# Allegro board pc043b_single_maroc_24.brd
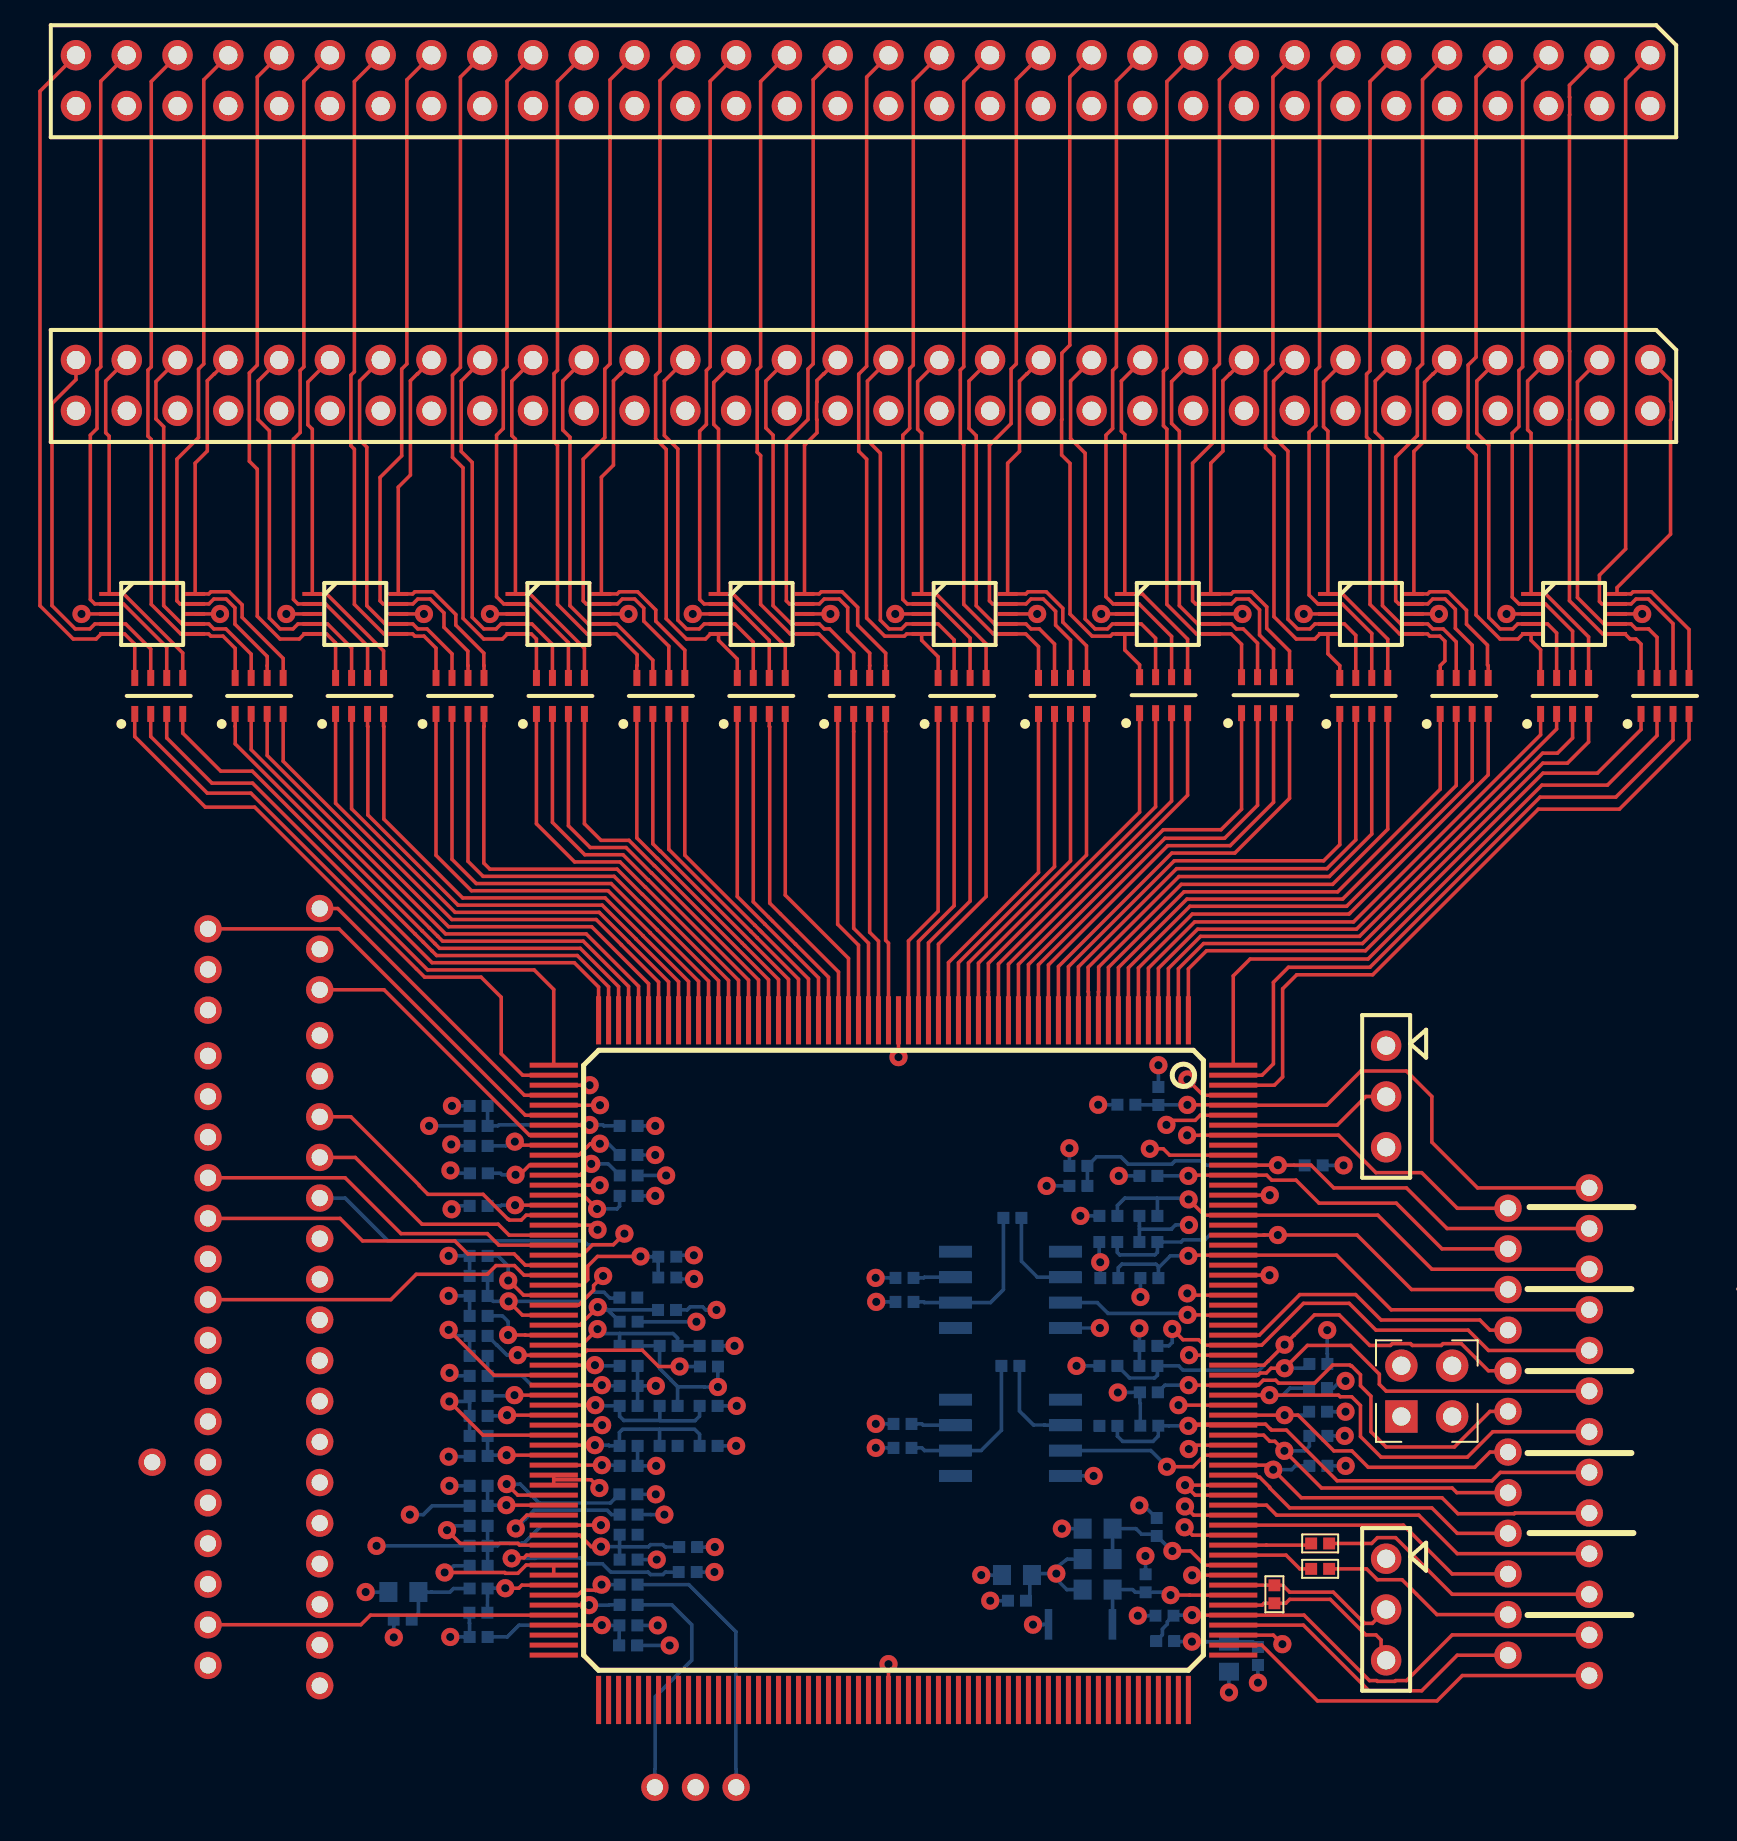
[diagram p0: board, top side]
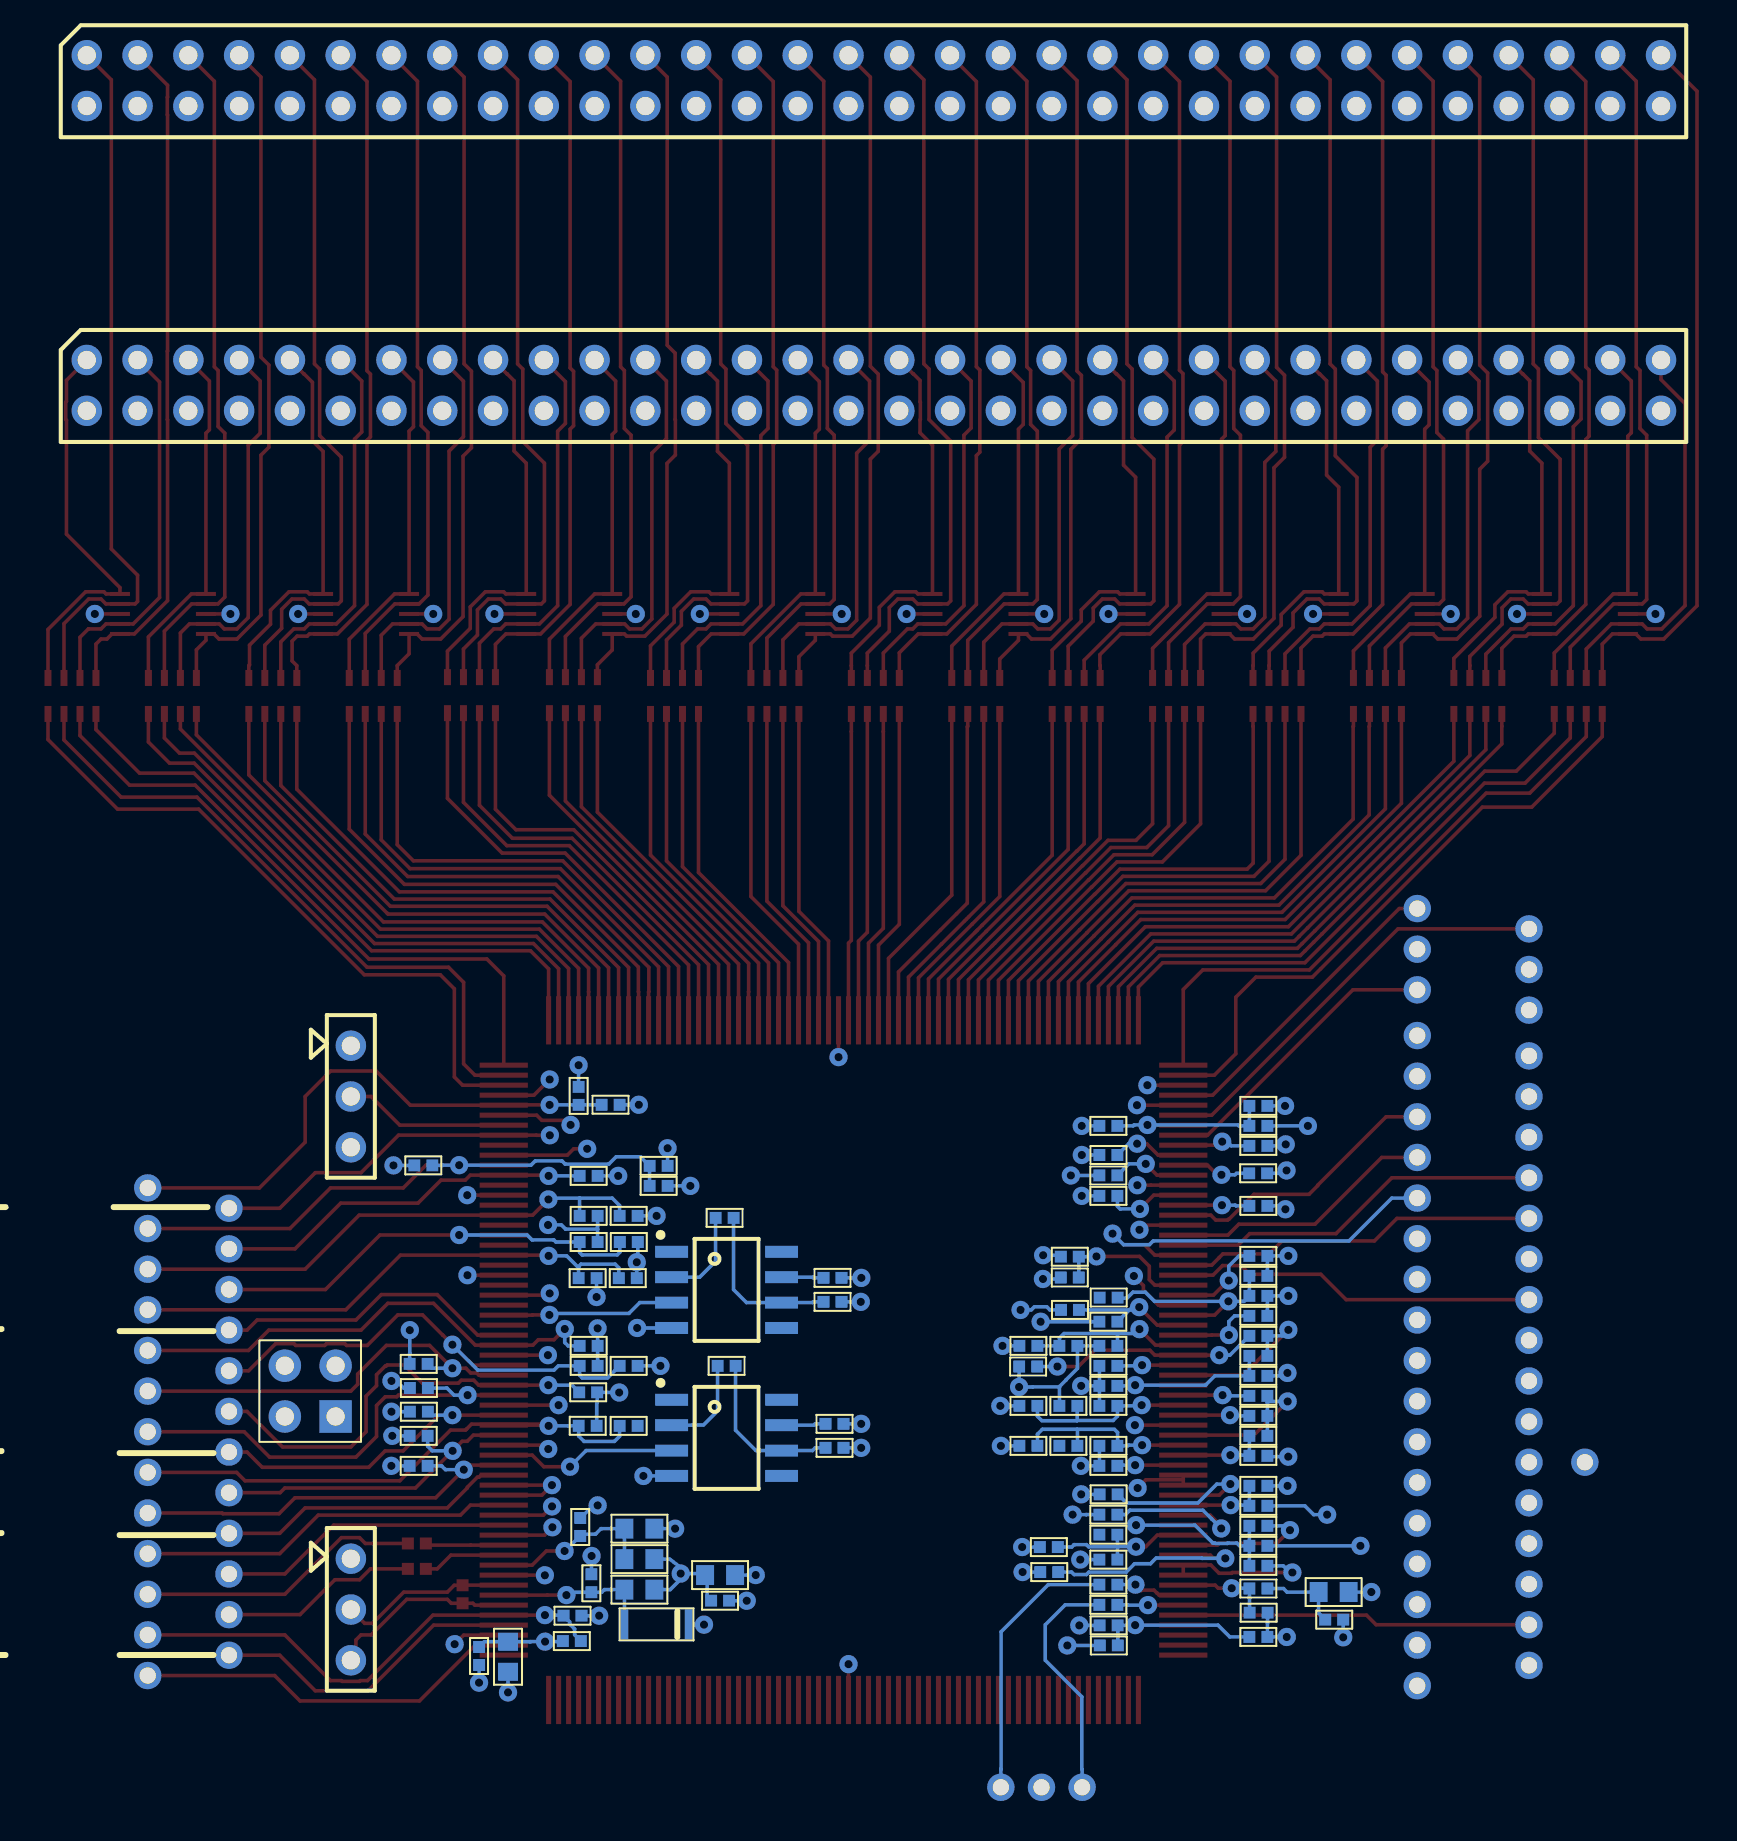
[diagram p1: board, bottom side, seen from below]

No outline. copper layers: TOP, L2, L3, L4, L5, BOTTOM. Coordinates in mm from the lowest, leftmost part position.

## Design rules (mm)
net group OR: nets OR<0> OR<1>
net group DC_BLOCKED_IN: nets DC_BLOCKED_IN<0> DC_BLOCKED_IN<1> DC_BLOCKED_IN<2> DC_BLOCKED_IN<3> DC_BLOCKED_IN<4> DC_BLOCKED_IN<5> DC_BLOCKED_IN<6> DC_BLOCKED_IN<7> DC_BLOCKED_IN<8> DC_BLOCKED_IN<9> DC_BLOCKED_IN<10> DC_BLOCKED_IN<11> DC_BLOCKED_IN<12> DC_BLOCKED_IN<13> DC_BLOCKED_IN<14> DC_BLOCKED_IN<15> DC_BLOCKED_IN<16> DC_BLOCKED_IN<17> DC_BLOCKED_IN<18> DC_BLOCKED_IN<19> DC_BLOCKED_IN<20> DC_BLOCKED_IN<21> DC_BLOCKED_IN<22> DC_BLOCKED_IN<23> DC_BLOCKED_IN<24> DC_BLOCKED_IN<25> DC_BLOCKED_IN<26> DC_BLOCKED_IN<27> DC_BLOCKED_IN<28> DC_BLOCKED_IN<29> DC_BLOCKED_IN<30> DC_BLOCKED_IN<31> DC_BLOCKED_IN<32> DC_BLOCKED_IN<33> DC_BLOCKED_IN<34> DC_BLOCKED_IN<35> DC_BLOCKED_IN<36> DC_BLOCKED_IN<37> DC_BLOCKED_IN<38> DC_BLOCKED_IN<39> DC_BLOCKED_IN<40> DC_BLOCKED_IN<41> DC_BLOCKED_IN<42> DC_BLOCKED_IN<43> DC_BLOCKED_IN<44> DC_BLOCKED_IN<45> DC_BLOCKED_IN<46> DC_BLOCKED_IN<47> DC_BLOCKED_IN<48> DC_BLOCKED_IN<49> DC_BLOCKED_IN<50> DC_BLOCKED_IN<51> DC_BLOCKED_IN<52> DC_BLOCKED_IN<53> DC_BLOCKED_IN<54> DC_BLOCKED_IN<55> DC_BLOCKED_IN<56> DC_BLOCKED_IN<57> DC_BLOCKED_IN<58> DC_BLOCKED_IN<59> DC_BLOCKED_IN<60> DC_BLOCKED_IN<61> DC_BLOCKED_IN<62> DC_BLOCKED_IN<63>
net group IN: nets IN<0> IN<1> IN<2> IN<3> IN<4> IN<5> IN<6> IN<7> IN<8> IN<9> IN<10> IN<11> IN<12> IN<13> IN<14> IN<15> IN<16> IN<17> IN<18> IN<19> IN<20> IN<21> IN<22> IN<23> IN<24> IN<25> IN<26> IN<27> IN<28> IN<29> IN<30> IN<31> IN<32> IN<33> IN<34> IN<35> IN<36> IN<37> IN<38> IN<39> IN<40> IN<41> IN<42> IN<43> IN<44> IN<45> IN<46> IN<47> IN<48> IN<49> IN<50> IN<51> IN<52> IN<53> IN<54> IN<55> IN<56> IN<57> IN<58> IN<59> IN<60> IN<61> IN<62> IN<63>
net group SUM: nets SUM<1> SUM<2> SUM<3> SUM<4> SUM<5> SUM<6> SUM<7> SUM<8>
net group TRIG: nets TRIG<0> TRIG<1> TRIG<2> TRIG<3> TRIG<4> TRIG<5> TRIG<6> TRIG<7> TRIG<8> TRIG<9> TRIG<10> TRIG<11> TRIG<12> TRIG<13> TRIG<14> TRIG<15> TRIG<16> TRIG<17> TRIG<18> TRIG<19> TRIG<20> TRIG<21> TRIG<22> TRIG<23> TRIG<24> TRIG<25> TRIG<26> TRIG<27> TRIG<28> TRIG<29> TRIG<30> TRIG<31> TRIG<32> TRIG<33> TRIG<34> TRIG<35> TRIG<36> TRIG<37> TRIG<38> TRIG<39> TRIG<40> TRIG<41> TRIG<42> TRIG<43> TRIG<44> TRIG<45> TRIG<46> TRIG<47> TRIG<48> TRIG<49> TRIG<50> TRIG<51> TRIG<52> TRIG<53> TRIG<54> TRIG<55> TRIG<56> TRIG<57> TRIG<58> TRIG<59> TRIG<60> TRIG<61> TRIG<62> TRIG<63>

## Placement (name value [footprint] x y rotation side)
C1  100nF  [C0402]  50.64 8.58 180 bottom
C2  100nF  [C0402]  16.32 8.73 0 bottom
C3  100nF  [C0402]  25.75 23.87 180 bottom
C4  100nF  [C0402]  50.33 34.57 270 bottom
C5  100nF  [C0402]  49.83 28.57 0 bottom
C6  100nF  [C0402]  16.33 34.07 0 bottom
C7  100nF  [C0402]  49.83 27.27 0 bottom
C8  100nF  [C0402]  16.33 33.07 0 bottom
C9  100nF  [C0402]  25.76 25.49 180 bottom
C10  100nF  [C0402]  49.88 25.46 0 bottom
C11  100nF  [C0402]  16.33 17.57 0 bottom
C12  100nF  [C0402]  49.83 21.07 0 bottom
C13  100nF  [C0402]  16.33 22.57 0 bottom
C14  100nF  [C0402]  16.33 15.07 0 bottom
C15  100nF  [C0402]  16.33 13.07 0 bottom
C16  100nF  [C0402]  49.87 18.08 0 bottom
C17  100nF  [C0402]  16.33 11.07 0 bottom
C18  100nF  [C0402]  16.33 32.07 0 bottom
C19  100nF  [C0402]  23.83 17.07 180 bottom
C20  100nF  [C0402]  16.33 29.07 0 bottom
C21  100nF  [C0402]  23.83 19.07 180 bottom
C22  100nF  [C0402]  16.33 23.57 0 bottom
C23  100nF  [C0402]  49.85 19.75 0 bottom
C24  100nF  [C0402]  16.33 25.57 0 bottom
C25  100nF  [C0402]  58.33 16.07 180 bottom
C26  100nF  [C0402]  16.33 18.57 0 bottom
C27  100nF  [C0402]  23.83 21.07 180 bottom
C28  100nF  [C0402]  23.83 29.57 180 bottom
C29  100nF  [C0402]  23.83 22.07 0 bottom
C30  100nF  [C0402]  23.83 13.64 180 bottom
C31  100nF  [C0402]  58.33 21.17 180 bottom
C32  100nF  [C0402]  23.83 31.62 180 bottom
C33  100nF  [C0402]  23.83 20.07 180 bottom
C34  100nF  [C0402]  26.81 12.01 180 bottom
C35  100nF  [C0402]  49.83 22.07 0 bottom
C36  100nF  [C0402]  23.84 30.59 180 bottom
C37  100nF  [C0402]  58.33 17.57 180 bottom
C38  100nF  [C0402]  58.1 31.1 180 bottom
C39  100nF  [C0402]  16.34 30.7 0 bottom
C40  100nF  [C0402]  16.33 26.57 0 bottom
C41  100nF  [C0402]  23.83 16.07 180 bottom
C42  100nF  [C0402]  58.32 19.97 180 bottom
C43  100nF  [C0402]  49.83 30.57 0 bottom
C44  100nF  [C0402]  23.82 8.1 180 bottom
C45  100nF  [C0402]  23.82 14.65 180 bottom
C46  100nF  [C0402]  58.32 18.78 180 bottom
C47  100nF  [C0402]  16.33 19.57 0 bottom
C48  100nF  [C0402]  37.53 18.17 180 bottom
C49  100nF  [C0402]  37.63 25.47 180 bottom
C50  100nF  [C0402]  49.69 10.2 270 bottom
C51  100nF  [C0402]  50.25 13.02 270 bottom
C52  10uF  [C0603]  53.86 6.53 90 bottom
C53  10uF  [C0603]  12.57 9.76 0 bottom
C54  10uF  [C0603]  43.25 10.61 0 bottom
CN1  100nF/16V  [CAPCAF80P160X320X110-8N]  0.33 54.57 90 top
CN2  100nF/16V  [CAPCAF80P160X320X110-8N]  5.35 54.57 90 top
CN3  100nF/16V  [CAPCAF80P160X320X110-8N]  10.38 54.57 90 top
CN4  100nF/16V  [CAPCAF80P160X320X110-8N]  15.4 54.57 90 top
CN5  100nF/16V  [CAPCAF80P160X320X110-8N]  20.42 54.57 90 top
CN6  100nF/16V  [CAPCAF80P160X320X110-8N]  25.44 54.57 90 top
CN7  100nF/16V  [CAPCAF80P160X320X110-8N]  30.47 54.57 90 top
CN8  100nF/16V  [CAPCAF80P160X320X110-8N]  35.49 54.57 90 top
CN9  100nF/16V  [CAPCAF80P160X320X110-8N]  40.51 54.57 90 top
CN10  100nF/16V  [CAPCAF80P160X320X110-8N]  45.53 54.57 90 top
CN11  100nF/16V  [CAPCAF80P160X320X110-8N]  50.59 54.61 90 top
CN12  100nF/16V  [CAPCAF80P160X320X110-8N]  55.69 54.61 90 top
CN13  100nF/16V  [CAPCAF80P160X320X110-8N]  60.6 54.57 90 top
CN14  100nF/16V  [CAPCAF80P160X320X110-8N]  65.63 54.57 90 top
CN15  100nF/16V  [CAPCAF80P160X320X110-8N]  70.65 54.57 90 top
CN16  100nF/16V  [CAPCAF80P160X320X110-8N]  75.67 54.57 90 top
D1  -  [SOD80C]  48.03 8.15 180 bottom
IC1  -  [SOIC127P598X200-8N]  42.93 17.47 180 bottom
IC2  -  [SOIC127P598X200-8N]  42.93 24.87 180 bottom
J1  -  [CONHE13D2X32M]  74.93 86.61 90 top
J2  -  [CONHE13D2X32M]  74.93 71.37 90 top
J3  -  [CONHE13D3X1M]  61.72 11.43 270 top
J4  -  [CONHE13D3X1M]  61.72 37.08 270 top
LK1  -  [1-HOLE_0-8P]  71.88 7.62 0 top
LK2  -  [1-HOLE_0-8P]  8.38 9.14 0 top
LK3  -  [1-HOLE_0-8P]  2.79 32.51 0 top
LK4  -  [1-HOLE_0-8P]  71.88 29.97 0 top
LK5  -  [1-HOLE_0-8P]  71.88 25.91 0 top
LK6  -  [1-HOLE_0-8P]  67.82 28.96 0 top
LK7  -  [1-HOLE_0-8P]  67.82 24.89 0 top
LK8  -  [1-HOLE_0-8P]  2.79 34.54 0 top
LK9  -  [1-HOLE_0-8P]  71.88 23.88 0 top
LK10  -  [1-HOLE_0-8P]  67.82 20.83 0 top
LK11  -  [1-HOLE_0-8P]  2.79 22.35 0 top
LK12  -  [1-HOLE_0-8P]  8.38 15.24 0 top
LK13  -  [1-HOLE_0-8P]  71.88 15.75 0 top
LK14  -  [1-HOLE_0-8P]  2.79 12.19 0 top
LK15  -  [1-HOLE_0-8P]  8.38 7.11 0 top
LK16  -  [1-HOLE_0-8P]  8.38 37.59 0 top
LK17  -  [1-HOLE_0-8P]  2.79 14.22 0 top
LK18  -  [1-HOLE_0-8P]  8.38 35.56 0 top
LK19  -  [1-HOLE_0-8P]  8.38 17.27 0 top
LK20  -  [1-HOLE_0-8P]  8.38 23.37 0 top
LK21  -  [1-HOLE_0-8P]  67.82 18.8 0 top
LK22  -  [1-HOLE_0-8P]  2.79 26.42 0 top
LK23  -  [1-HOLE_0-8P]  71.88 13.72 0 top
LK24  -  [1-HOLE_0-8P]  2.79 18.29 0 top
LK25  -  [1-HOLE_0-8P]  8.38 21.34 0 top
LK26  -  [1-HOLE_0-8P]  71.88 5.59 0 top
LK27  -  [1-HOLE_0-8P]  2.79 16.26 0 top
LK28  -  [1-HOLE_0-8P]  71.88 11.68 0 top
LK29  -  [1-HOLE_0-8P]  67.82 10.67 0 top
LK30  -  [1-HOLE_0-8P]  0 16.26 0 top
LK31  -  [1-HOLE_0-8P]  2.79 38.86 0 top
LK32  -  [1-HOLE_0-8P]  8.38 25.4 0 top
LK33  -  [1-HOLE_0-8P]  8.38 11.18 0 top
LK34  -  [1-HOLE_0-8P]  71.88 19.81 0 top
LK35  -  [1-HOLE_0-8P]  8.38 41.91 0 top
LK36  -  [1-HOLE_0-8P]  2.79 20.32 0 top
LK37  -  [1-HOLE_0-8P]  2.79 6.1 0 top
LK38  -  [1-HOLE_0-8P]  71.88 21.84 0 top
LK39  -  [1-HOLE_0-8P]  2.79 40.89 0 top
LK40  -  [1-HOLE_0-8P]  67.82 14.73 0 top
LK41  -  [1-HOLE_0-8P]  71.88 27.94 0 top
LK42  -  [1-HOLE_0-8P]  2.79 36.58 0 top
LK43  -  [1-HOLE_0-8P]  8.38 27.43 0 top
LK44  -  [1-HOLE_0-8P]  2.79 10.16 0 top
LK45  -  [1-HOLE_0-8P]  71.88 17.78 0 top
LK46  -  [1-HOLE_0-8P]  67.82 26.92 0 top
LK47  -  [1-HOLE_0-8P]  8.38 5.08 0 top
LK48  -  [1-HOLE_0-8P]  8.38 13.21 0 top
LK49  -  [1-HOLE_0-8P]  67.82 16.76 0 top
LK50  -  [1-HOLE_0-8P]  8.38 19.3 0 top
LK51  -  [1-HOLE_0-8P]  67.82 8.64 0 top
LK52  -  [1-HOLE_0-8P]  71.88 9.65 0 top
LK53  -  [1-HOLE_0-8P]  8.38 29.46 0 top
LK54  -  [1-HOLE_0-8P]  25.15 0 0 top
LK55  -  [1-HOLE_0-8P]  27.18 0 0 top
LK56  -  [1-HOLE_0-8P]  29.21 0 0 top
LK57  -  [1-HOLE_0-8P]  8.38 39.88 0 top
LK58  -  [1-HOLE_0-8P]  67.82 22.86 0 top
LK59  -  [1-HOLE_0-8P]  2.79 8.13 0 top
LK60  -  [1-HOLE_0-8P]  8.38 43.94 0 top
LK61  -  [1-HOLE_0-8P]  8.38 33.53 0 top
LK62  -  [1-HOLE_0-8P]  2.79 30.48 0 top
LK63  -  [1-HOLE_0-8P]  67.82 12.7 0 top
LK64  -  [1-HOLE_0-8P]  8.38 31.5 0 top
LK65  -  [1-HOLE_0-8P]  2.79 28.45 0 top
LK66  -  [1-HOLE_0-8P]  2.79 42.93 0 top
LK67  -  [1-HOLE_0-8P]  2.79 24.38 0 top
LK68  -  [1-HOLE_0-8P]  67.82 6.6 0 top
PL1  -  [HEADER2X2_STR]  62.48 18.54 90 bottom
R1  51  [C0402]  58.42 10.92 0 top
R2  51  [C0402]  58.42 12.19 0 top
R3  10R  [C0402]  50.67 7.31 180 bottom
R4  10R  [C0402]  16.33 9.94 0 bottom
R5  10R  [C0402]  23.83 23.28 0 bottom
R6  10R  [C0402]  48.73 34.13 180 bottom
R7  10R  [C0402]  47.83 28.57 180 bottom
R8  10R  [C0402]  23.83 33.07 0 bottom
R9  10R  [C0402]  47.82 27.27 180 bottom
R10  10R  [C0402]  25.76 26.53 0 bottom
R11  10R  [C0402]  47.87 25.46 180 bottom
R12  10R  [C0402]  16.33 16.57 180 bottom
R13  10R  [C0402]  47.83 21.07 180 bottom
R14  100  [C0402]  27.85 21.04 0 bottom
R15  10R  [C0402]  16.33 14.07 180 bottom
R16  10R  [C0402]  16.33 12.07 180 bottom
R17  100  [C0402]  47.83 18.07 180 bottom
R18  51  [C0402]  23.83 9.12 180 bottom
R19  51  [C0402]  23.83 10.13 180 bottom
R20  XX  [C0402]  25.83 17.07 0 bottom
R21  XX  [C0402]  27.83 17.07 180 bottom
R22  XX  [C0402]  25.83 19.07 0 bottom
R23  XX  [C0402]  27.83 19.07 180 bottom
R24  100  [C0402]  56.13 9.65 270 top
R25  XX  [C0402]  23.82 24.49 0 bottom
R26  XX  [C0402]  16.33 24.57 0 bottom
R27  1k  [C0402]  26.79 10.76 0 bottom
R28  XX  [C0402]  25.83 22.07 180 bottom
R29  XX  [C0402]  27.83 22.07 180 bottom
R30  XX  [C0402]  16.33 20.57 180 bottom
R31  XX  [C0402]  16.33 21.57 0 bottom
R32  XX  [C0402]  23.83 12.63 0 bottom
R33  XX  [C0402]  23.83 11.39 180 bottom
R34  XX  [C0402]  46.33 31.07 180 bottom
R35  XX  [C0402]  46.33 30.07 0 bottom
R36  XX  [C0402]  23.81 7.09 0 bottom
R37  XX  [C0402]  16.33 7.52 0 bottom
R38  51R  [C0402]  42.93 21.07 180 bottom
R39  51R  [C0402]  43.03 28.47 180 bottom
R40  51R  [C0402]  37.53 16.97 180 bottom
R41  51R  [C0402]  37.63 24.27 180 bottom
R42  82  [C0603]  47.29 9.89 180 bottom
R44  150  [C0603]  47.29 11.41 180 bottom
R45  120  [C0603]  47.29 12.93 0 bottom
R46  3.3R  [C0402]  55.31 6.56 90 bottom
R47  3.3R  [C0402]  12.54 8.38 0 bottom
R48  3.3R  [C0402]  43.25 9.33 180 bottom
U1  -  [PQFP240_050]  51.83 38.35 270 top
U2  -  [SOT552-1]  71.12 58.67 0 top
U3  -  [SOT552-1]  60.96 58.67 0 top
U4  -  [SOT552-1]  50.8 58.67 0 top
U5  -  [SOT552-1]  40.64 58.67 0 top
U6  -  [SOT552-1]  30.48 58.67 0 top
U7  -  [SOT552-1]  20.32 58.67 0 top
U8  -  [SOT552-1]  10.16 58.67 0 top
U9  -  [SOT552-1]  0 58.67 0 top

## Library data of the parts
C1-C17 = CAPCERSMDCL2: part number: CAPCERSMDCL2_0402-100NF_X7R,16V; tolerance: 10%
C18-C51 = CAPCERSMDCL2: part number: CAPCERSMDCL2_0402-100NF,16V; tolerance: 10%
C52-C54 = CAPCERSMDCL2: part number: CAPCERSMDCL2_0603-10UF_X5R,6.3V
CN1-CN16 = CAPN4I: part number: CAPN4I-100NF,16V,X7R,CKCA43
D1 = BAS32L: part number: BAS32L-BAS32L
IC1 IC2 = AD8061: part number: AD8061ARZ
J1 J2 = CON64P: part number: CON64P-BARD2X32
J3 J4 = CON3P: part number: CON3P-SIL254D
LK1-LK68 = 1-HOLE: part number: 1-HOLE_0-8-BASE
PL1 = HEADER2X2: part number: HEADER2X2_STR-HARWIN
R1 R2 R18 R19 = RSMD0402: part number: RSMD0402_1/16W-51,1%; tolerance: 1%
R3-R13 R15 R16 = RSMD0402: part number: RSMD0402_1/16W-10R,5%; tolerance: 5%
R14 R17 = RSMD0402: part number: RSMD0402_1/16W-100,0.1%_GEN; tolerance: 0.1%
R20-R23 R25 R26 R28-R37 = RSMD0402: part number: RSMD0402_0.0625W-XX,1%; tolerance: 1%
R24 = RSMD0402: part number: RSMD0402_1/16W-100,1%; tolerance: 1%
R27 = RSMD0402: part number: RSMD0402_1/16W-1K,5%; tolerance: 5%
R38-R41 = RSMD0402: part number: RSMD0402_1/16W-51R,5%; tolerance: 5%
R42 = RSMD0603: part number: RSMD0603_1/10W-82,1%; tolerance: 1%
R44 = RSMD0603: part number: RSMD0603_1/10W-150,1%; tolerance: 1%
R45 = RSMD0603: part number: RSMD0603_1/10W-120,1%; tolerance: 1%
R46-R48 = RSMD0402: part number: RSMD0402_1/16W-3.3R,5%; tolerance: 5%
U1 = MAROC3: part number: MAROC3_PQFP-IN2P3
U2-U9 = PRTR5V0U8S: part number: PRTR5V0U8S_TSSOP-NXP

## Footprints (pads in the part's own frame, mm; a bottom-side part is the same pattern mirrored in y, then rotated)
1-HOLE_0-8P
  round 1.372 hole 0.813: 1(0,0)
C0402
  rect 0.6x0.6 smd: 1(-0.45,0) 2(0.45,0)
C0603
  rect 0.9x1 smd: 1(-0.75,0) 2(0.75,0)
CAPCAF80P160X320X110-8N
  rect 0.8x0.35 smd: 1(-0.9,1.2) 2(0.9,1.2) 3(-0.9,0.4) 4(0.9,0.4) 5(-0.9,-0.4) 6(0.9,-0.4) 7(-0.9,-1.2) 8(0.9,-1.2)
CONHE13D2X32M
  round 1.524 hole 0.914: 1(0,0) 2(-2.54,0) 3(0,2.54) 4(-2.54,2.54) 5(0,5.08) 6(-2.54,5.08) 7(0,7.62) 8(-2.54,7.62) 9(0,10.16) 10(-2.54,10.16) 11(0,12.7) 12(-2.54,12.7) 13(0,15.24) 14(-2.54,15.24) 15(0,17.78) 16(-2.54,17.78) 17(0,20.32) 18(-2.54,20.32) 19(0,22.86) 20(-2.54,22.86) 21(0,25.4) 22(-2.54,25.4) 23(0,27.94) 24(-2.54,27.94) 25(0,30.48) 26(-2.54,30.48) 27(0,33.02) 28(-2.54,33.02) 29(0,35.56) 30(-2.54,35.56) 31(0,38.1) 32(-2.54,38.1) 33(0,40.64) 34(-2.54,40.64) 35(0,43.18) 36(-2.54,43.18) 37(0,45.72) 38(-2.54,45.72) 39(0,48.26) 40(-2.54,48.26) 41(0,50.8) 42(-2.54,50.8) 43(0,53.34) 44(-2.54,53.34) 45(0,55.88) 46(-2.54,55.88) 47(0,58.42) 48(-2.54,58.42) 49(0,60.96) 50(-2.54,60.96) 51(0,63.5) 52(-2.54,63.5) 53(0,66.04) 54(-2.54,66.04) 55(0,68.58) 56(-2.54,68.58) 57(0,71.12) 58(-2.54,71.12) 59(0,73.66) 60(-2.54,73.66) 61(0,76.2) 62(-2.54,76.2) 63(0,78.74) 64(-2.54,78.74)
CONHE13D3X1M
  round 1.524 hole 0.914: 1(0,0) 2(2.54,0) 3(5.08,0)
HEADER2X2_STR
  rect 1.626x1.626 hole 0.914: 1(0,0)
  round 1.626 hole 0.914: 2(0,2.54) 3(2.54,0) 4(2.54,2.54)
PQFP240_050
  rect 2.413x0.254 smd: 1(0,0) 2(0,-0.5) 3(0,-1) 4(0,-1.5) 5(0,-2) 6(0,-2.5) 7(0,-3) 8(0,-3.5) 9(0,-4) 10(0,-4.5) 11(0,-5) 12(0,-5.5) 13(0,-6) 14(0,-6.5) 15(0,-7) 16(0,-7.5) 17(0,-8) 18(0,-8.5) 19(0,-9) 20(0,-9.5) 21(0,-10) 22(0,-10.5) 23(0,-11) 24(0,-11.5) 25(0,-12) 26(0,-12.5) 27(0,-13) 28(0,-13.5) 29(0,-14) 30(0,-14.5) 31(0,-15) 32(0,-15.5) 33(0,-16) 34(0,-16.5) 35(0,-17) 36(0,-17.5) 37(0,-18) 38(0,-18.5) 39(0,-19) 40(0,-19.5) 41(0,-20) 42(0,-20.5) 43(0,-21) 44(0,-21.5) 45(0,-22) 46(0,-22.5) 47(0,-23) 48(0,-23.5) 49(0,-24) 50(0,-24.5) 51(0,-25) 52(0,-25.5) 53(0,-26) 54(0,-26.5) 55(0,-27) 56(0,-27.5) 57(0,-28) 58(0,-28.5) 59(0,-29) 60(0,-29.5) 121(33.987,-29.5) 122(33.987,-29) 123(33.987,-28.5) 124(33.987,-28) 125(33.987,-27.5) 126(33.987,-27) 127(33.987,-26.5) 128(33.987,-26) 129(33.987,-25.5) 130(33.987,-25) 131(33.987,-24.5) 132(33.987,-24) 133(33.987,-23.5) 134(33.987,-23) 135(33.987,-22.5) 136(33.987,-22) 137(33.987,-21.5) 138(33.987,-21) 139(33.987,-20.5) 140(33.987,-20) 141(33.987,-19.5) 142(33.987,-19) 143(33.987,-18.5) 144(33.987,-18) 145(33.987,-17.5) 146(33.987,-17) 147(33.987,-16.5) 148(33.987,-16) 149(33.987,-15.5) 150(33.987,-15) 151(33.987,-14.5) 152(33.987,-14) 153(33.987,-13.5) 154(33.987,-13) 155(33.987,-12.5) 156(33.987,-12) 157(33.987,-11.5) 158(33.987,-11) 159(33.987,-10.5) 160(33.987,-10) 161(33.987,-9.5) 162(33.987,-9) 163(33.987,-8.5) 164(33.987,-8) 165(33.987,-7.5) 166(33.987,-7) 167(33.987,-6.5) 168(33.987,-6) 169(33.987,-5.5) 170(33.987,-5) 171(33.987,-4.5) 172(33.987,-4) 173(33.987,-3.5) 174(33.987,-3) 175(33.987,-2.5) 176(33.987,-2) 177(33.987,-1.5) 178(33.987,-1) 179(33.987,-0.5) 180(33.987,0)
  rect 0.254x2.413 smd: 61(2.244,-31.744) 62(2.744,-31.744) 63(3.244,-31.744) 64(3.744,-31.744) 65(4.244,-31.744) 66(4.744,-31.744) 67(5.244,-31.744) 68(5.744,-31.744) 69(6.244,-31.744) 70(6.744,-31.744) 71(7.244,-31.744) 72(7.744,-31.744) 73(8.243,-31.744) 74(8.743,-31.744) 75(9.243,-31.744) 76(9.743,-31.744) 77(10.243,-31.744) 78(10.743,-31.744) 79(11.243,-31.744) 80(11.743,-31.744) 81(12.243,-31.744) 82(12.743,-31.744) 83(13.243,-31.744) 84(13.743,-31.744) 85(14.243,-31.744) 86(14.743,-31.744) 87(15.243,-31.744) 88(15.743,-31.744) 89(16.244,-31.744) 90(16.744,-31.744) 91(17.244,-31.744) 92(17.744,-31.744) 93(18.244,-31.744) 94(18.744,-31.744) 95(19.244,-31.744) 96(19.744,-31.744) 97(20.244,-31.744) 98(20.744,-31.744) 99(21.244,-31.744) 100(21.744,-31.744) 101(22.244,-31.744) 102(22.744,-31.744) 103(23.244,-31.744) 104(23.744,-31.744) 105(24.244,-31.744) 106(24.744,-31.744) 107(25.244,-31.744) 108(25.744,-31.744) 109(26.244,-31.744) 110(26.744,-31.744) 111(27.244,-31.744) 112(27.744,-31.744) 113(28.244,-31.744) 114(28.744,-31.744) 115(29.244,-31.744) 116(29.744,-31.744) 117(30.244,-31.744) 118(30.744,-31.744) 119(31.244,-31.744) 120(31.744,-31.744) 181(31.744,2.244) 182(31.244,2.244) 183(30.744,2.244) 184(30.244,2.244) 185(29.744,2.244) 186(29.244,2.244) 187(28.744,2.244) 188(28.244,2.244) 189(27.744,2.244) 190(27.244,2.244) 191(26.744,2.244) 192(26.244,2.244) 193(25.744,2.244) 194(25.244,2.244) 195(24.744,2.244) 196(24.244,2.244) 197(23.744,2.244) 198(23.244,2.244) 199(22.744,2.244) 200(22.244,2.244) 201(21.744,2.244) 202(21.244,2.244) 203(20.744,2.244) 204(20.244,2.244) 205(19.744,2.244) 206(19.244,2.244) 207(18.744,2.244) 208(18.244,2.244) 209(17.744,2.244) 210(17.244,2.244) 211(16.744,2.244) 212(16.244,2.244) 213(15.743,2.244) 214(15.243,2.244) 215(14.743,2.244) 216(14.243,2.244) 217(13.743,2.244) 218(13.243,2.244) 219(12.743,2.244) 220(12.243,2.244) 221(11.743,2.244) 222(11.243,2.244) 223(10.743,2.244) 224(10.243,2.244) 225(9.743,2.244) 226(9.243,2.244) 227(8.743,2.244) 228(8.243,2.244) 229(7.744,2.244) 230(7.244,2.244) 231(6.744,2.244) 232(6.244,2.244) 233(5.744,2.244) 234(5.244,2.244) 235(4.744,2.244) 236(4.244,2.244) 237(3.744,2.244) 238(3.244,2.244) 239(2.744,2.244) 240(2.244,2.244)
SOD80C
  rect 0.381x1.524 smd: 1(0,0) 2(3.2,0)
SOIC127P598X200-8N
  rect 1.65x0.6 smd: 1(-2.75,1.905) 2(-2.75,0.635) 3(-2.75,-0.635) 4(-2.75,-1.905) 5(2.75,-1.905) 6(2.75,-0.635) 7(2.75,0.635) 8(2.75,1.905)
SOT552-1
  rect 1x0.2 smd: 1(-2.15,1) 2(-2.15,0.5) 3(-2.15,0) 4(-2.15,-0.5) 5(-2.15,-1) 6(2.15,-1) 7(2.15,-0.5) 8(2.15,0) 9(2.15,0.5) 10(2.15,1)

## Nets
AVDD: C29.2(B<0>) C48.1(A<0>) C49.1(A<0>) IC1.7(PVS) IC2.7(PVS) R5.2(B<0>) R6.2(B<0>) R7.2(B<0>) R8.2(B<0>) R9.2(B<0>) R10.2(B<0>) R11.2(B<0>) R12.2(B<0>) R13.2(B<0>) R14.2(B<0>) R15.2(B<0>) R16.2(B<0>) R17.2(B<0>) R20.2(B<0>) R22.2(B<0>) R25.2(B<0>) R27.2(B<0>) R28.2(B<0>) R30.2(B<0>) R32.2(B<0>) R34.2(B<0>) R36.2(B<0>) R46.1(A<0>) R47.1(A<0>) R48.2(B<0>)
GND_SIGNAL: C1.2(B<0>) C2.1(A<0>) C3.1(A<0>) C4.1(A<0>) C5.1(A<0>) C6.1(A<0>) C7.1(A<0>) C8.1(A<0>) C9.1(A<0>) C10.1(A<0>) C11.1(A<0>) C12.1(A<0>) C13.1(A<0>) C14.1(A<0>) C15.1(A<0>) C16.1(A<0>) C17.1(A<0>) C18.1(A<0>) C19.1(A<0>) C20.1(A<0>) C21.1(A<0>) C22.1(A<0>) C23.1(A<0>) C24.1(A<0>) C25.1(A<0>) C26.1(A<0>) C27.1(A<0>) C28.1(A<0>) C30.1(A<0>) C31.1(A<0>) C32.1(A<0>) C33.1(A<0>) C34.1(A<0>) C35.1(A<0>) C36.1(A<0>) C37.1(A<0>) C38.1(A<0>) C39.1(A<0>) C40.1(A<0>) C41.1(A<0>) C42.1(A<0>) C43.1(A<0>) C44.1(A<0>) C45.1(A<0>) C46.1(A<0>) C47.1(A<0>) C48.2(B<0>) C49.2(B<0>) C50.1(A<0>) C51.1(A<0>) C52.1(A<0>) C53.1(A<0>) C54.1(A<0>) D1.2(K<0>) IC1.4(MVS) IC2.4(MVS) J1.2(A<1>) J1.4(A<3>) J1.6(A<5>) J1.8(A<7>) J1.10(A<9>) J1.12(A<11>) J1.14(A<13>) J1.16(A<15>) J1.18(A<17>) J1.20(A<19>) J1.22(A<21>) J1.24(A<23>) J1.26(A<25>) J1.28(A<27>) J1.30(A<29>) J1.32(A<31>) J1.34(A<33>) J1.36(A<35>) J1.38(A<37>) J1.40(A<39>) J1.42(A<41>) J1.44(A<43>) J1.46(A<45>) J1.48(A<47>) J1.50(A<49>) J1.52(A<51>) J1.54(A<53>) J1.56(A<55>) J1.58(A<57>) J1.60(A<59>) J1.62(A<61>) J1.64(A<63>) J2.2(A<1>) J2.4(A<3>) J2.6(A<5>) J2.8(A<7>) J2.10(A<9>) J2.12(A<11>) J2.14(A<13>) J2.16(A<15>) J2.18(A<17>) J2.20(A<19>) J2.22(A<21>) J2.24(A<23>) J2.26(A<25>) J2.28(A<27>) J2.30(A<29>) J2.32(A<31>) J2.34(A<33>) J2.36(A<35>) J2.38(A<37>) J2.40(A<39>) J2.42(A<41>) J2.44(A<43>) J2.46(A<45>) J2.48(A<47>) J2.50(A<49>) J2.52(A<51>) J2.54(A<53>) J2.56(A<55>) J2.58(A<57>) J2.60(A<59>) J2.62(A<61>) J2.64(A<63>) J3.1(A<0>) J4.3(A<2>) LK30.1(A<0>) LK55.1(A<0>) PL1.2(B1<0>) PL1.4(B2<0>) R21.1(A<0>) R23.1(A<0>) R26.1(A<0>) R29.1(A<0>) R31.1(A<0>) R33.1(A<0>) R35.1(A<0>) R37.1(A<0>) R45.1(A<0>) U1.30(GND_PA2) U1.63(GND_PA) U1.65(VSSA) U1.73(GND_NMOS) U1.77(GND_W) U1.85(GND_DAC) U1.92(E_FSU) U1.98(GND_WILK) U1.102(VSSA2) U1.103(VSSM) U1.109(GND_DISCRI) U1.111(VSSD) U1.112(GNDD) U1.150(VSSD2) U1.183(GNDD2) U1.189(VSSD3) U1.195(GND_DISCRI2) U1.197(VSSM2) U1.198(VSS) U1.202(GND_FSU) U1.206(GND_FSB1) U1.211(GND_FSB0) U1.217(GND_CAPA) U1.219(GND_SS) U1.227(GND_OTAG) U1.231(GND_NMOS2) U1.235(VSSI) U1.237(GND_PA3) U2.3 U2.8 U3.3 U3.8 U4.3 U4.8 U5.3 U5.8 U6.3 U6.8 U7.3 U7.8 U8.3 U8.8 U9.3 U9.8
VDD_BUF1: C7.2(B<0>) LK7.1(A<0>) R9.1(A<0>) U1.223(VDD_BUF1)
VDD_DAC: C3.2(B<0>) LK3.1(A<0>) R5.1(A<0>) U1.87(VDD_DAC)
VDD_DISCRI: C14.2(B<0>) LK14.1(A<0>) R15.1(A<0>) U1.105(VDD_DISCRI)
VDD_DISCRIADC: C15.2(B<0>) C17.2(B<0>) LK15.1(A<0>) R16.1(A<0>) U1.107(VDD_DISCRIADC) U1.193(VDD_DISCRIADC2)
VDD_FSB: C12.2(B<0>) LK10.1(A<0>) R13.1(A<0>) U1.210(VDD_FSB)
VDD_FSU1: C13.2(B<0>) LK11.1(A<0>) R14.1(A<0>) U1.90(VDD_FSU1)
VDD_FSU2: C16.2(B<0>) LK13.1(A<0>) R17.1(A<0>) U1.204(VDD_FSU2)
VDD_OTAG: C5.2(B<0>) LK5.1(A<0>) R7.1(A<0>) U1.225(VDD_OTAG)
VDD_PA: C6.2(B<0>) C8.2(B<0>) LK6.1(A<0>) R8.1(A<0>) U1.67(VDD_PA) U1.233(VDD_PA2)
VDD_PAD: C4.2(B<0>) LK4.1(A<0>) R6.1(A<0>) U1.236(VDD_PAD)
VDD_SS: C10.2(B<0>) LK9.1(A<0>) R11.1(A<0>) U1.221(VDD_SS)
VDD_W: C9.2(B<0>) LK8.1(A<0>) R10.1(A<0>) U1.83(VDD_W)
VDD_WILK: C11.2(B<0>) LK12.1(A<0>) R12.1(A<0>) U1.100(VDD_WILK)
VDDD: C1.1(A<0>) LK1.1(A<0>) R3.2(B<0>) U1.185(VDDD)
VDDD2: C2.2(B<0>) LK2.1(A<0>) R4.2(B<0>) U1.113(VDDD2)
ADC_DAV: LK54.1(A<0>) R18.1(A<0>)
BUF_OUT_FS: PL1.1(A1<0>) R40.2(B<0>)
BUF_OUT_Q: PL1.3(A2<0>) R41.2(B<0>)
CK_40M: J3.2(A<1>) R24.1(A<0>) U1.188(CK_40M)
CK_R: LK64.1(A<0>) U1.78(CK_R)
CK_SC: LK57.1(A<0>) U1.68(CK_SC)
CKB_40M: J3.3(A<2>) R24.2(B<0>) U1.186(CKB_40M)
CTEST: J4.1(A<0>)
D_R: LK67.1(A<0>) U1.82(D_R)
D_SC: LK60.1(A<0>) U1.64(D_SC)
DC_BLOCKED_IN<0>: CN16.7(A<0>) U1.238(IN0)
DC_BLOCKED_IN<1>: CN16.5(A<0>) U1.239(IN1)
DC_BLOCKED_IN<2>: CN16.3(A<0>) U1.240(IN2)
DC_BLOCKED_IN<3>: CN16.1(A<0>) U1.1(IN3)
DC_BLOCKED_IN<4>: CN15.7(A<0>) U1.2(IN4)
DC_BLOCKED_IN<5>: CN15.5(A<0>) U1.3(IN5)
DC_BLOCKED_IN<6>: CN15.3(A<0>) U1.4(IN6)
DC_BLOCKED_IN<7>: CN15.1(A<0>) U1.5(IN7)
DC_BLOCKED_IN<8>: CN14.7(A<0>) U1.6(IN8)
DC_BLOCKED_IN<9>: CN14.5(A<0>) U1.7(IN9)
DC_BLOCKED_IN<10>: CN14.3(A<0>) U1.8(IN10)
DC_BLOCKED_IN<11>: CN14.1(A<0>) U1.9(IN11)
DC_BLOCKED_IN<12>: CN13.7(A<0>) U1.10(IN12)
DC_BLOCKED_IN<13>: CN13.5(A<0>) U1.11(IN13)
DC_BLOCKED_IN<14>: CN13.3(A<0>) U1.12(IN14)
DC_BLOCKED_IN<15>: CN13.1(A<0>) U1.13(IN15)
DC_BLOCKED_IN<16>: CN12.7(A<0>) U1.14(IN16)
DC_BLOCKED_IN<17>: CN12.5(A<0>) U1.15(IN17)
DC_BLOCKED_IN<18>: CN12.3(A<0>) U1.16(IN18)
DC_BLOCKED_IN<19>: CN12.1(A<0>) U1.17(IN19)
DC_BLOCKED_IN<20>: CN11.7(A<0>) U1.18(IN20)
DC_BLOCKED_IN<21>: CN11.5(A<0>) U1.19(IN21)
DC_BLOCKED_IN<22>: CN11.3(A<0>) U1.20(IN22)
DC_BLOCKED_IN<23>: CN11.1(A<0>) U1.21(IN23)
DC_BLOCKED_IN<24>: CN10.7(A<0>) U1.22(IN24)
DC_BLOCKED_IN<25>: CN10.5(A<0>) U1.23(IN25)
DC_BLOCKED_IN<26>: CN10.3(A<0>) U1.24(IN26)
DC_BLOCKED_IN<27>: CN10.1(A<0>) U1.25(IN27)
DC_BLOCKED_IN<28>: CN9.7(A<0>) U1.26(IN28)
DC_BLOCKED_IN<29>: CN9.5(A<0>) U1.27(IN29)
DC_BLOCKED_IN<30>: CN9.3(A<0>) U1.28(IN30)
DC_BLOCKED_IN<31>: CN9.1(A<0>) U1.29(IN31)
DC_BLOCKED_IN<32>: CN8.7(A<0>) U1.31(IN32)
DC_BLOCKED_IN<33>: CN8.5(A<0>) U1.32(IN33)
DC_BLOCKED_IN<34>: CN8.3(A<0>) U1.33(IN34)
DC_BLOCKED_IN<35>: CN8.1(A<0>) U1.34(IN35)
DC_BLOCKED_IN<36>: CN7.7(A<0>) U1.35(IN36)
DC_BLOCKED_IN<37>: CN7.5(A<0>) U1.36(IN37)
DC_BLOCKED_IN<38>: CN7.3(A<0>) U1.37(IN38)
DC_BLOCKED_IN<39>: CN7.1(A<0>) U1.38(IN39)
DC_BLOCKED_IN<40>: CN6.7(A<0>) U1.39(IN40)
DC_BLOCKED_IN<41>: CN6.5(A<0>) U1.40(IN41)
DC_BLOCKED_IN<42>: CN6.3(A<0>) U1.41(IN42)
DC_BLOCKED_IN<43>: CN6.1(A<0>) U1.42(IN43)
DC_BLOCKED_IN<44>: CN5.7(A<0>) U1.43(IN44)
DC_BLOCKED_IN<45>: CN5.5(A<0>) U1.44(IN45)
DC_BLOCKED_IN<46>: CN5.3(A<0>) U1.45(IN46)
DC_BLOCKED_IN<47>: CN5.1(A<0>) U1.46(IN47)
DC_BLOCKED_IN<48>: CN4.7(A<0>) U1.47(IN48)
DC_BLOCKED_IN<49>: CN4.5(A<0>) U1.48(IN49)
DC_BLOCKED_IN<50>: CN4.3(A<0>) U1.49(IN50)
DC_BLOCKED_IN<51>: CN4.1(A<0>) U1.50(IN51)
DC_BLOCKED_IN<52>: CN3.7(A<0>) U1.51(IN52)
DC_BLOCKED_IN<53>: CN3.5(A<0>) U1.52(IN53)
DC_BLOCKED_IN<54>: CN3.3(A<0>) U1.53(IN54)
DC_BLOCKED_IN<55>: CN3.1(A<0>) U1.54(IN55)
DC_BLOCKED_IN<56>: CN2.7(A<0>) U1.55(IN56)
DC_BLOCKED_IN<57>: CN2.5(A<0>) U1.56(IN57)
DC_BLOCKED_IN<58>: CN2.3(A<0>) U1.57(IN58)
DC_BLOCKED_IN<59>: CN2.1(A<0>) U1.58(IN59)
DC_BLOCKED_IN<60>: CN1.7(A<0>) U1.59(IN60)
DC_BLOCKED_IN<61>: CN1.5(A<0>) U1.60(IN61)
DC_BLOCKED_IN<62>: CN1.3(A<0>) U1.61(IN62)
DC_BLOCKED_IN<63>: CN1.1(A<0>) U1.62(IN63)
EN_OTAG: LK58.1(A<0>) U1.213(EN_OTAG)
G_DIODE: C27.2(B<0>) LK25.1(A<0>) U1.91(G_DIODE)
HOLD1: LK62.1(A<0>) U1.79(HOLD1)
HOLD2: LK65.1(A<0>) U1.81(HOLD2)
IB_INTEG: C41.2(B<0>) LK44.1(A<0>) U1.101(IB_INTEG)
IB_SUM: C35.2(B<0>) LK38.1(A<0>) U1.212(IB_SUM)
IB_W: C31.2(B<0>) LK34.1(A<0>) U1.209(IB_W)
IBI_BUF: C28.2(B<0>) LK31.1(A<0>) U1.74(IBI_BUF)
IBI_SS: C32.2(B<0>) LK35.1(A<0>) U1.70(IBI_SS)
IBO_DAC: C40.2(B<0>) LK43.1(A<0>) U1.84(IBO_DAC)
IBO_SS: C36.2(B<0>) LK39.1(A<0>) U1.72(IBO_SS)
IN<0>: CN16.8(B<0>) J2.1(A<0>) U2.10(IN)
IN<1>: CN16.6(B<0>) J1.1(A<0>) U2.9(IN)
IN<2>: CN16.4(B<0>) J2.3(A<2>) U2.7(IN)
IN<3>: CN16.2(B<0>) J1.3(A<2>) U2.6(IN)
IN<4>: CN15.8(B<0>) J2.5(A<4>) U2.1(IN)
IN<5>: CN15.6(B<0>) J1.5(A<4>) U2.2(IN)
IN<6>: CN15.4(B<0>) J2.7(A<6>) U2.4(IN)
IN<7>: CN15.2(B<0>) J1.7(A<6>) U2.5(IN)
IN<8>: CN14.8(B<0>) J2.9(A<8>) U3.10(IN)
IN<9>: CN14.6(B<0>) J1.9(A<8>) U3.9(IN)
IN<10>: CN14.4(B<0>) J2.11(A<10>) U3.7(IN)
IN<11>: CN14.2(B<0>) J1.11(A<10>) U3.6(IN)
IN<12>: CN13.8(B<0>) J2.13(A<12>) U3.1(IN)
IN<13>: CN13.6(B<0>) J1.13(A<12>) U3.2(IN)
IN<14>: CN13.4(B<0>) J2.15(A<14>) U3.4(IN)
IN<15>: CN13.2(B<0>) J1.15(A<14>) U3.5(IN)
IN<16>: CN12.8(B<0>) J2.17(A<16>) U4.10(IN)
IN<17>: CN12.6(B<0>) J1.17(A<16>) U4.9(IN)
IN<18>: CN12.4(B<0>) J2.19(A<18>) U4.7(IN)
IN<19>: CN12.2(B<0>) J1.19(A<18>) U4.6(IN)
IN<20>: CN11.8(B<0>) J2.21(A<20>) U4.1(IN)
IN<21>: CN11.6(B<0>) J1.21(A<20>) U4.2(IN)
IN<22>: CN11.4(B<0>) J2.23(A<22>) U4.4(IN)
IN<23>: CN11.2(B<0>) J1.23(A<22>) U4.5(IN)
IN<24>: CN10.8(B<0>) J2.25(A<24>) U5.10(IN)
IN<25>: CN10.6(B<0>) J1.25(A<24>) U5.9(IN)
IN<26>: CN10.4(B<0>) J2.27(A<26>) U5.7(IN)
IN<27>: CN10.2(B<0>) J1.27(A<26>) U5.6(IN)
IN<28>: CN9.8(B<0>) J2.29(A<28>) U5.1(IN)
IN<29>: CN9.6(B<0>) J1.29(A<28>) U5.2(IN)
IN<30>: CN9.4(B<0>) J2.31(A<30>) U5.4(IN)
IN<31>: CN9.2(B<0>) J1.31(A<30>) U5.5(IN)
IN<32>: CN8.8(B<0>) J2.33(A<32>) U6.10(IN)
IN<33>: CN8.6(B<0>) J1.33(A<32>) U6.9(IN)
IN<34>: CN8.4(B<0>) J2.35(A<34>) U6.7(IN)
IN<35>: CN8.2(B<0>) J1.35(A<34>) U6.6(IN)
IN<36>: CN7.8(B<0>) J2.37(A<36>) U6.1(IN)
IN<37>: CN7.6(B<0>) J1.37(A<36>) U6.2(IN)
IN<38>: CN7.4(B<0>) J2.39(A<38>) U6.4(IN)
IN<39>: CN7.2(B<0>) J1.39(A<38>) U6.5(IN)
IN<40>: CN6.8(B<0>) J2.41(A<40>) U7.10(IN)
IN<41>: CN6.6(B<0>) J1.41(A<40>) U7.9(IN)
IN<42>: CN6.4(B<0>) J2.43(A<42>) U7.7(IN)
IN<43>: CN6.2(B<0>) J1.43(A<42>) U7.6(IN)
IN<44>: CN5.8(B<0>) J2.45(A<44>) U7.1(IN)
IN<45>: CN5.6(B<0>) J1.45(A<44>) U7.2(IN)
IN<46>: CN5.4(B<0>) J2.47(A<46>) U7.4(IN)
IN<47>: CN5.2(B<0>) J1.47(A<46>) U7.5(IN)
IN<48>: CN4.8(B<0>) J2.49(A<48>) U8.10(IN)
IN<49>: CN4.6(B<0>) J1.49(A<48>) U8.9(IN)
IN<50>: CN4.4(B<0>) J2.51(A<50>) U8.7(IN)
IN<51>: CN4.2(B<0>) J1.51(A<50>) U8.6(IN)
IN<52>: CN3.8(B<0>) J2.53(A<52>) U8.1(IN)
IN<53>: CN3.6(B<0>) J1.53(A<52>) U8.2(IN)
IN<54>: CN3.4(B<0>) J2.55(A<54>) U8.4(IN)
IN<55>: CN3.2(B<0>) J1.55(A<54>) U8.5(IN)
IN<56>: CN2.8(B<0>) J2.57(A<56>) U9.10(IN)
IN<57>: CN2.6(B<0>) J1.57(A<56>) U9.9(IN)
IN<58>: CN2.4(B<0>) J2.59(A<58>) U9.7(IN)
IN<59>: CN2.2(B<0>) J1.59(A<58>) U9.6(IN)
IN<60>: CN1.8(B<0>) J2.61(A<60>) U9.1(IN)
IN<61>: CN1.6(B<0>) J1.61(A<60>) U9.2(IN)
IN<62>: CN1.4(B<0>) J2.63(A<62>) U9.4(IN)
IN<63>: CN1.2(B<0>) J1.63(A<62>) U9.5(IN)
IREF_DAC: C24.2(B<0>) LK22.1(A<0>) R25.1(A<0>) R26.2(B<0>) U1.86(IREF_DAC)
OR<0>: LK51.1(A<0>) R1.2(B<0>)
OR<1>: LK52.1(A<0>) R2.2(B<0>)
OUT_ADC: LK56.1(A<0>) R19.1(A<0>)
OUT_FS: IC1.3(PIN) U1.201(OUT_FS)
OUT_Q: IC2.3(PIN) U1.215(OUT_Q)
PWR_ON: R27.1(A<0>) U1.110(PWR_ON)
QBUF_R: LK61.1(A<0>) U1.76(QBUF_R)
QBUF_SC: LK63.1(A<0>) U1.199(QBUF_SC)
RAMP: LK27.1(A<0>) U1.97(RAMP)
RSTB_R: LK53.1(A<0>) U1.80(RSTB_R)
RSTN_ADC: LK68.1(A<0>) U1.184(RSTN_ADC)
RSTN_SC: LK66.1(A<0>) U1.66(RSTN_SC)
START_ADCB: LK59.1(A<0>) U1.116(START_ADCB)
SUM<1>: U1.228(SUM1)
SUM<2>: U1.226(SUM2)
SUM<3>: U1.224(SUM3)
SUM<4>: U1.222(SUM4)
SUM<5>: U1.220(SUM5)
SUM<6>: U1.218(SUM6)
SUM<7>: U1.216(SUM7)
SUM<8>: U1.214(SUM8)
TRIG<0>: LK26.1(A<0>) U1.182(OUT0)
TRIG<1>: U1.181(OUT1)
TRIG<2>: U1.180(OUT2)
TRIG<3>: U1.179(OUT3)
TRIG<4>: U1.178(OUT4)
TRIG<5>: U1.177(OUT5)
TRIG<6>: U1.176(OUT6)
TRIG<7>: U1.175(OUT7)
TRIG<8>: U1.174(OUT8)
TRIG<9>: U1.173(OUT9)
TRIG<10>: U1.172(OUT10)
TRIG<11>: U1.171(OUT11)
TRIG<12>: U1.170(OUT12)
TRIG<13>: U1.169(OUT13)
TRIG<14>: U1.168(OUT14)
TRIG<15>: U1.167(OUT15)
TRIG<16>: U1.166(OUT16)
TRIG<17>: U1.165(OUT17)
TRIG<18>: U1.164(OUT18)
TRIG<19>: U1.163(OUT19)
TRIG<20>: U1.162(OUT20)
TRIG<21>: U1.161(OUT21)
TRIG<22>: U1.160(OUT22)
TRIG<23>: U1.159(OUT23)
TRIG<24>: U1.158(OUT24)
TRIG<25>: U1.157(OUT25)
TRIG<26>: U1.156(OUT26)
TRIG<27>: U1.155(OUT27)
TRIG<28>: U1.154(OUT28)
TRIG<29>: U1.153(OUT29)
TRIG<30>: U1.152(OUT30)
TRIG<31>: U1.151(OUT31)
TRIG<32>: U1.149(OUT32)
TRIG<33>: U1.148(OUT33)
TRIG<34>: U1.147(OUT34)
TRIG<35>: U1.146(OUT35)
TRIG<36>: U1.145(OUT36)
TRIG<37>: U1.144(OUT37)
TRIG<38>: U1.143(OUT38)
TRIG<39>: U1.142(OUT39)
TRIG<40>: U1.141(OUT40)
TRIG<41>: U1.140(OUT41)
TRIG<42>: U1.139(OUT42)
TRIG<43>: U1.138(OUT43)
TRIG<44>: U1.137(OUT44)
TRIG<45>: U1.136(OUT45)
TRIG<46>: U1.135(OUT46)
TRIG<47>: U1.134(OUT47)
TRIG<48>: U1.133(OUT48)
TRIG<49>: U1.132(OUT49)
TRIG<50>: U1.131(OUT50)
TRIG<51>: U1.130(OUT51)
TRIG<52>: U1.129(OUT52)
TRIG<53>: U1.128(OUT53)
TRIG<54>: U1.127(OUT54)
TRIG<55>: U1.126(OUT55)
TRIG<56>: U1.125(OUT56)
TRIG<57>: U1.124(OUT57)
TRIG<58>: U1.123(OUT58)
TRIG<59>: U1.122(OUT59)
TRIG<60>: U1.121(OUT60)
TRIG<61>: U1.120(OUT61)
TRIG<62>: U1.119(OUT62)
TRIG<63>: U1.118(OUT63)
UNNAMED_1_MAROC3_I1_OR0: R1.1(A<0>) U1.191(OR_0)
UNNAMED_1_MAROC3_I1_OR1: R2.1(A<0>) U1.192(OR_1)
UNNAMED_2_CAPCERSMDCL2_I82_B: C53.2(B<0>) R4.1(A<0>) R47.2(B<0>)
UNNAMED_2_CAPCERSMDCL2_I84_B: C52.2(B<0>) R3.1(A<0>) R46.2(B<0>)
UNNAMED_3_CAPCERSMDCL2_I242_B: C54.2(B<0>) R42.2(B<0>) R44.2(B<0>) R48.1(A<0>)
UNNAMED_3_CON3P_I231_A: J4.2(A<1>) U1.234(CTEST)
UNNAMED_3_MAROC3_I1_ADCDAV: R18.2(B<0>) U1.115(ADC_DAV)
UNNAMED_3_MAROC3_I1_OUTADC: R19.2(B<0>) U1.114(OUT_ADC)
UNNAMED_8_AD8061_I1_MIN: IC1.2(MIN) R38.1(A<0>)
UNNAMED_8_AD8061_I1_VOUT: IC1.6(VOUT) R38.2(B<0>) R40.1(A<0>)
UNNAMED_8_AD8061_I11_MIN: IC2.2(MIN) R39.1(A<0>)
UNNAMED_8_AD8061_I11_VOUT: IC2.6(VOUT) R39.2(B<0>) R41.1(A<0>)
V_BG: C25.2(B<0>) LK23.1(A<0>) U1.200(V_BG)
VB_OTAFSU: C37.2(B<0>) LK40.1(A<0>) U1.203(VB_OTAFSU)
VBI_DISCRI: C45.2(B<0>) LK48.1(A<0>) U1.104(VBI_DISCRI)
VBI_DISCRIADC: C44.2(B<0>) LK47.1(A<0>) R36.1(A<0>) R37.2(B<0>) U1.117(VBI_DISCRIADC)
VBI_FSB: C42.2(B<0>) LK45.1(A<0>) U1.207(VBI_FSB)
VBI_PA: C38.2(B<0>) LK41.1(A<0>) R34.1(A<0>) R35.2(B<0>) U1.230(VBI_PA)
VBI_TZ: C29.1(A<0>) LK32.1(A<0>) R28.1(A<0>) R29.2(B<0>) U1.89(VBI_TZ)
VBM_DISCRI: C30.2(B<0>) LK33.1(A<0>) U1.106(VBM_DISCRI)
VBO_DISCRI: C34.2(B<0>) LK37.1(A<0>) R32.1(A<0>) R33.2(B<0>) U1.108(VBO_DISCRI)
VBO_FSB: C46.2(B<0>) LK49.1(A<0>) U1.205(VBO_FSB)
VBO_TZ: C33.2(B<0>) LK36.1(A<0>) R30.1(A<0>) R31.2(B<0>) U1.93(VBO_TZ)
VCASC_FSU: C47.2(B<0>) LK50.1(A<0>) U1.94(VCASC_FSU)
VCASC_NMOS: C43.2(B<0>) LK46.1(A<0>) U1.229(VCASC_NMOS)
VCASC_PMOS: C39.2(B<0>) LK42.1(A<0>) U1.71(VCASC_PMOS)
VGAIN_PA: C18.2(B<0>) LK16.1(A<0>) U1.69(VGAIN_PA)
VH: C51.2(B<0>) R44.1(A<0>) R45.2(B<0>) U1.190(VH)
VL: C50.2(B<0>) D1.1(A<0>) R42.1(A<0>) U1.187(VL)
VREF_DAC: C22.2(B<0>) LK20.1(A<0>) U1.88(VREF_DAC)
VREF_FSB: C23.2(B<0>) LK21.1(A<0>) U1.208(VREF_FSB)
VREF_FSU: C26.2(B<0>) LK24.1(A<0>) U1.96(VREF_FSU)
VREF_RAMP: C19.2(B<0>) LK17.1(A<0>) R20.1(A<0>) R21.2(B<0>) U1.99(VREF_RAMP)
VREF_SS: C20.2(B<0>) LK18.1(A<0>) U1.75(VREF_SS)
VSLOPE: C21.2(B<0>) LK19.1(A<0>) R22.1(A<0>) R23.2(B<0>) U1.95(VSLOPE)
VTH0: LK28.1(A<0>) U1.196(VTH0)
VTH1: LK29.1(A<0>) U1.194(VTH1)

Pads without a net: IC1 1 5 8; IC2 1 5 8; U1 232

## Via types
v1: diameter 0.914, hole 0.406, TOP to BOTTOM, 169 vias

## Routing (per net, layer and track width the routed paths; a pad name or vN(x,y) marks a point on that pad's centre or on a via; arc(x,y) is an arc through that point)
AVDD: length 37.5
  BOTTOM w0.18: R27.2 v1(28.12,10.76) ; 26.28,20.02 R22.2 ; 26.28,20.02 27.62,20.02 27.62,20.02 v1(28.3,20.02) R14.2 ; 26.28,20.02 26.28,20.04 25.94,20.38 25.94,20.38 25.38,20.94 R28.2 C29.2 ; R9.2 47.37,26.31 v1(47.42,26.26) R11.2 ; v1(27.1,26.61) 26.29,26.61 R10.2 ; R8.2 v1(25.16,33.07) ; v1(14.88,20.72) 15.02,20.57 R30.2 ; R47.1 v1(12.09,7.5) ; R34.2 v1(45.88,31.96) ; R36.2 v1(25.89,7.09) ; v1(11.23,12.07) R16.2 ; IC1.7 38.56,18.11 38.5,18.17 C48.1 ; R7.2 v1(46.43,28.57) ; 40.18,25.51 38.63,25.51 38.6,25.47 C49.1 ; R48.2 v1(41.92,9.33) ; R6.2 v1(47.32,34.13) ; R12.2 15.84,16.53 v1(14.83,16.53) ; R5.2 v1(27.22,23.28) ; R15.2 14,14.07 13.56,13.63 v1(12.89,13.63) ; R13.2 v1(46.24,21.07) ; R46.1 v1(55.31,5.23)
GND_SIGNAL: length 171.5
  TOP w0.18: U6.8 v1(33.93,58.67) ; v1(14.87,19.29) 16.55,17.61 U1.98 ; U7.8 v1(23.83,58.67) ; U9.8 v1(3.39,58.67) ; U1.85 21.33,24.11 22.08,24.86 22.08,25.09 v1(22.56,25.57) ; 20.09,11.06 20.03,11.12 18.71,11.12 18.29,10.7 17.67,10.7 17.63,10.74 v1(14.63,10.74) ; 20.09,11.06 U1.112 ; 20.09,11.06 U1.111 ; U1.65 v1(22.4,34.11) ; U4.3 v1(47.47,58.67) ; U8.3 v1(6.71,58.67) ; U8.8 v1(13.59,58.67) ; U1.189 52.02,10.61 52.02,10.61 v1(52.02,10.6) ; U1.235 52.43,33.61 52.17,33.35 50.96,33.35 v1(50.73,33.12) ; U2.3 v1(67.74,58.67) ; v1(22.28,27.88) 22.27,27.88 22.04,28.11 U1.77 ; v1(22.38,30.11) 21.71,30.11 21.71,30.11 U1.73 ; v1(51.66,14.04) 51.66,14.04 52.09,13.61 U1.195 ; U1.63 v1(21.88,35.11) ; U4.8 v1(54.54,58.67) ; U6.3 v1(27.04,58.67) ; 20.09,15.38 U1.103 ; 20.09,15.38 U1.102 ; 20.09,15.38 21.96,15.38 v1(22.37,14.96) ; v1(51.78,24.7) 51.87,24.61 U1.217 ; U5.8 v1(44.27,58.67) ; U1.109 18.38,12.11 18.29,12.2 15.41,12.2 v1(14.75,12.86) ; U1.211 v1(51.87,21.61) ; U1.219 55.5,25.61 55.5,25.61 v1(55.89,25.61) ; U5.3 v1(37.17,58.67) ; U1.197 52.16,14.61 v1(51.66,15.11) U1.198 ; v1(56.53,7.16) 56.08,7.61 U1.183 ; U1.202 52.04,17.11 v1(51.85,16.91) ; U3.3 v1(57.6,58.67) ; v1(49.9,31.93) 50.58,31.93 50.89,31.61 U1.231 ; U2.8 v1(74.53,58.67) ; U1.150 v1(36.83,6.16) ; U3.8 v1(64.36,58.67) ; U1.206 v1(51.33,19.11) ; U1.227 v1(55.9,29.61) ; v1(51.78,35.4) 52.56,34.61 U1.237 ; U9.3 v1(-3.53,58.67) ; U1.92 17.09,20.61 v1(14.83,22.87) ; U7.3 v1(16.9,58.67) ; U1.30 v1(37.33,36.51)
  BOTTOM w0.18: v1(51.86,28.12) 51.18,28.12 50.99,27.93 50.99,27.92 49.38,27.92 49.38,27.92 ; C9.1 26.29,25.42 v1(27.11,25.42) ; C28.1 v1(25.16,29.57) ; C43.1 v1(48.35,30.57) ; C33.1 C27.1 ; C33.1 C21.1 ; C33.1 v1(25.19,20.07) ; v1(59.69,20.32) 59.44,20.32 59.08,19.97 C42.1 ; 15.88,19.25 C26.1 C11.1 ; 15.88,19.25 15.83,19.29 v1(14.87,19.29) ; 15.88,19.25 C47.1 ; v1(14.96,32.15) 15.04,32.07 C18.1 ; C10.1 v1(49.43,24.52) ; C2.1 15.87,8.21 15.88,8.2 R37.1 v1(14.91,7.52) ; R21.1 v1(29.21,17.07) ; C3.1 26.76,23.87 26.91,24.03 27.53,24.03 27.69,23.87 v1(28.23,23.87) ; C12.1 C35.1 v1(49.38,22.95) ; v1(14.83,22.87) 15.13,22.57 C13.1 R31.1 ; R35.1 v1(44.74,30.07) ; v1(14.98,28.91) 15.15,29.07 C20.1 ; C24.1 C40.1 v1(14.83,26.57) ; v1(45.5,12.93) R45.1 ; C32.1 v1(25.16,31.62) ; C38.1 v1(59.59,31.1) ; R23.1 v1(29.24,19.07) ; R29.1 v1(29.13,22.07) ; IC2.4 v1(47.4,22.97) ; 49.38,27.92 C7.1 ; 49.38,27.92 49.38,28.06 49.38,28.06 C5.1 ; C39.1 15.06,30.7 v1(14.92,30.85) ; C45.1 v1(25.19,14.65) ; C34.1 v1(28.14,12.01) ; C16.1 49.42,19.21 49.4,19.24 C23.1 v1(48.3,19.74) ; C50.1 v1(49.68,11.57) ; C48.2 v1(36.2,18.17) ; C30.1 24.94,13.64 24.95,13.63 v1(25.62,13.63) ; C54.1 v1(41.47,10.61) ; C44.1 v1(25.29,8.1) ; v1(14.63,10.74) 14.75,10.74 15.08,11.07 C17.1 ; v1(49.38,14.1) 49.6,14.1 50.22,13.47 C51.1 ; IC1.4 v1(47.09,15.57) ; v1(14.75,12.86) 14.96,13.07 C15.1 ; v1(25.21,16.07) C41.1 C19.1 ; v1(14.83,24.57) R26.1 C22.1 ; C37.1 v1(59.65,17.57) ; C31.1 58.78,21.69 58.77,21.7 v1(58.77,22.86) ; C25.1 v1(59.7,16.07) ; C53.1 v1(10.68,9.76) ; D1.2 44.57,8.15 44.56,8.13 v1(44.06,8.13) ; C36.1 v1(25.71,30.59) ; C14.1 v1(14.87,15.07) ; R33.1 v1(25.24,11.39) ; v1(59.69,18.78) C46.1 ; C52.1 v1(53.86,4.74) ; C1.2 v1(49.3,8.58) ; C4.1 v1(50.33,36.11) ; C8.1 v1(13.85,33.07) ; C6.1 v1(15,34.07) ; C49.2 v1(36.19,25.47)
VDD_BUF1: length 24.2
  TOP w0.18: LK7.1 62.99,24.89 60.27,27.62 v1(56.3,27.62) 55.63,27.62 55.62,27.61 U1.223
  BOTTOM w0.18: R9.1 48.27,26.75 48.4,26.62 50.15,26.62 50.28,26.75 C7.2 51.47,27.27 51.57,27.37 52.66,27.37 52.9,27.62 v1(56.3,27.62)
VDD_DAC: length 30.1
  TOP w0.18: v1(22.29,24.01) 21.39,23.11 U1.87
  L3 w0.18: LK3.1 9.65,32.51 13.95,28.21 16.75,28.21 20.95,24.01 v1(22.29,24.01)
  BOTTOM w0.18: C3.2 22.43,23.87 v1(22.29,24.01) 22.64,24.01 22.92,23.73 22.93,23.73 R5.1
VDD_DISCRI: length 20.4
  TOP w0.18: v1(17.72,14.11) U1.105
  L3 w0.18: LK14.1 10.16,12.19 10.92,12.95 11.54,12.95 11.94,12.56 13.34,12.56 14.33,13.56 17.16,13.56 v1(17.72,14.11)
  BOTTOM w0.18: C14.2 R15.1 16.82,14.11 v1(17.72,14.11)
VDD_DISCRIADC: length 60.1
  TOP w0.18: U1.193 52.03,12.61 v1(51.64,13) ; U1.107 v1(22.45,13.11)
  L3 w0.18: LK15.1 10.51,7.11 10.97,6.66 15.99,6.66 v1(22.45,13.11) 24.58,13.11 24.75,12.94 35.12,12.94 36.11,13.93 48.56,13.93 49.49,13 v1(51.64,13)
  BOTTOM w0.18: R16.1 17.27,12.07 17.41,12.21 17.86,12.21 17.88,12.2 18.5,12.2 18.51,12.21 18.6,12.21 19.5,13.11 v1(22.45,13.11) ; R16.1 C17.2 ; R16.1 C15.2
VDD_FSB: length 25.8
  TOP w0.18: LK10.1 66.84,20.83 65.48,22.18 64.57,22.18 64.48,22.1 63.03,22.1 62.94,22.18 62.03,22.18 61.94,22.1 60.9,22.1 59.37,23.62 58.14,23.62 57.12,22.61 57.12,22.61 v1(56.64,22.13) 55.83,21.32 55.82,21.32 55.61,21.11 U1.210
  BOTTOM w0.18: v1(56.64,22.13) 55.37,20.86 51.56,20.86 51.35,21.07 C12.2 50.28,20.6 50.14,20.47 48.89,20.47 R13.1
VDD_FSU1: length 27.3
  TOP w0.18: v1(26.38,21.04) 25.33,21.04 24.52,21.86 21.76,21.86 21.51,21.61 U1.90 v1(18.28,21.61)
  L3 w0.18: LK11.1 12.27,22.35 12.45,22.18 15.94,22.18 16.51,21.61 v1(18.28,21.61)
  BOTTOM w0.18: C13.2 17.23,22.12 17.24,22.12 17.75,21.61 v1(18.28,21.61) ; R14.1 v1(26.38,21.04)
VDD_FSU2: length 28.4
  TOP w0.18: LK13.1 67.43,15.75 67.01,15.33 59.27,15.33 56.74,17.86 55.98,17.86 55.93,17.92 55.69,18.16 51.92,18.16 51.87,18.11 ; 51.87,18.11 U1.204 ; 51.87,18.11 v1(51.83,18.07)
  BOTTOM w0.18: v1(51.83,18.07) 50.84,18.07 50.84,18.08 C16.2 50.32,17.56 50.06,17.3 48.54,17.3 48.28,17.56 R17.1
VDD_OTAG: length 26.6
  TOP w0.18: v1(51.84,29.4) 52.63,28.61 U1.225 61.31,28.61 64.01,25.91 LK5.1
  BOTTOM w0.18: 50.27,29.46 48.65,29.46 48.28,29.09 R7.1 ; 50.27,29.46 51.78,29.46 v1(51.84,29.4) ; 50.27,29.46 50.28,29.45 C5.2
VDD_PA: length 58.3
  TOP w0.18: U1.67 21.55,33.11 21.56,33.12 v1(21.88,33.12) ; LK6.1 65.28,28.96 63.5,30.73 61.21,30.73 59.34,32.61 U1.233 52.45,32.61 52.44,32.61 v1(51.77,32.61)
  L3 w0.18: v1(51.77,32.61) 50.4,31.23 48.68,31.23 48.64,31.27 48.06,31.27 48.02,31.23 26.68,31.23 25.54,32.37 23.75,32.37 23,33.12 v1(21.88,33.12)
  BOTTOM w0.18: C6.2 C8.2 17.3,33.07 17.34,33.12 v1(21.88,33.12) 22.55,33.12 22.6,33.07 R8.1
VDD_PAD: length 27.2
  TOP w0.18: LK4.1 66.29,29.97 64.01,32.26 64.01,34.54 62.73,35.82 60.46,35.82 58.75,34.11 U1.236 54.06,34.12 v1(51.78,34.12)
  BOTTOM w0.18: v1(51.78,34.12) C4.2 R6.1
VDD_SS: length 26.2
  TOP w0.18: v1(51.83,26.57) 51.87,26.61 U1.221 59.24,26.61 61.98,23.88 LK9.1
  BOTTOM w0.18: 50.33,25.98 50.93,26.57 v1(51.83,26.57) ; 50.33,25.98 50.33,26.04 50.21,26.16 48.5,26.16 48.32,25.98 R11.1 ; 50.33,25.98 C10.2
VDD_W: length 32.2
  TOP w0.18: U1.83 21.51,25.11 21.79,25.39 21.79,26.06 22.28,26.55 v1(24.43,26.55)
  L3 w0.18: v1(24.43,26.55) 19.43,26.55 16.2,29.77 14.22,29.77 9.45,34.54 LK8.1
  BOTTOM w0.18: v1(24.43,26.55) 24.78,26.55 24.79,26.53 R10.1 C9.2
VDD_WILK: length 14.2
  TOP w0.18: U1.100 v1(17.73,16.61)
  L3 w0.18: v1(17.73,16.61) 16.56,16.61 15.79,15.84 11.52,15.84 10.92,15.24 LK12.1
  BOTTOM w0.18: C11.2 R12.1 16.82,16.61 v1(17.73,16.61)
VDDD: length 24.8
  TOP w0.18: v1(52.01,8.61) U1.185 57.61,8.61 60.89,5.33 61.25,5.33 61.29,5.3 62.16,5.3 62.19,5.33 62.74,5.33 65.02,7.62 LK1.1
  BOTTOM w0.18: v1(52.01,8.61) 51.12,8.61 C1.1 51.08,8.58 50.78,8.27 50.78,8.16 50.53,7.91 50.53,7.62 R3.2
VDDD2: length 14.6
  TOP w0.18: v1(17.66,9.95) 18.34,9.95 18.49,10.11 U1.113
  L3 w0.18: LK2.1 10.32,9.14 10.39,9.07 10.97,9.07 11.04,9.14 14.74,9.14 15.55,9.95 v1(17.66,9.95)
  BOTTOM w0.18: C2.2 16.78,10.08 R4.2 16.88,9.95 v1(17.66,9.95)
ADC_DAV: length 12
  BOTTOM w0.18: R18.1 25.99,9.12 26.99,8.12 26.99,6.35 25.16,4.52 25.16,0.92 25.15,0.9 LK54.1
BUF_OUT_FS: length 29.7
  L3 w0.18: PL1.1 61.47,19.56 56.92,19.56 56.17,20.31 56.15,20.31 55.63,20.83 47.75,20.83 43.9,16.97 v1(36.2,16.97)
  BOTTOM w0.18: R40.2 v1(36.2,16.97)
BUF_OUT_Q: length 29.1
  L3 w0.18: v1(36.22,24.27) 38.27,22.22 51.31,22.22 51.44,22.35 55.88,22.35 56.35,22.83 56.93,22.83 57.66,22.1 61.47,22.1 PL1.3
  BOTTOM w0.18: R41.2 v1(36.22,24.27)
CK_40M: length 8.9
  TOP w0.18: 56.31,10.1 56.3,10.11 U1.188 ; 56.31,10.1 56.55,10.1 56.9,9.76 59.08,9.76 60.64,8.2 61.03,8.2 J3.2 ; 56.31,10.1 R24.1
CK_R: length 13.3
  TOP w0.18: U1.78 17.86,27.61 17.31,28.16 13.5,28.16 10.16,31.5 LK64.1
CK_SC: length 14.7
  TOP w0.18: LK57.1 11.6,39.88 18.87,32.61 U1.68
CKB_40M: length 9.5
  TOP w0.18: U1.186 55.53,9.11 55.62,9.2 R24.2 56.7,9.2 56.9,9.4 58.93,9.4 60.71,7.62 61.21,7.62 61.47,7.37 61.47,6.6 J3.3
D_R: length 18.2
  TOP w0.18: LK67.1 11.94,24.38 13.21,25.65 16.76,25.65 17.2,26.09 18.12,26.09 18.6,25.61 U1.82
D_SC: length 15.6
  TOP w0.18: LK60.1 9.28,43.94 18.62,34.61 U1.64
DC_BLOCKED_IN<0>: length 33.8
  TOP w0.18: U1.238 56.13,35.11 56.54,35.52 56.54,39.93 57.25,40.63 61.05,40.63 69.33,48.91 73.39,48.91 76.87,52.39 CN16.7
DC_BLOCKED_IN<1>: length 32.6
  TOP w0.18: U1.239 55.52,35.61 56.08,36.18 56.08,40.25 56.84,41.01 60.91,41.01 69.42,49.51 73.21,49.51 76.07,52.37 CN16.5
DC_BLOCKED_IN<2>: length 31.7
  TOP w0.18: U1.240 54.07,40.58 54.92,41.42 60.82,41.42 69.51,50.11 72.79,50.11 75.27,52.59 CN16.3
DC_BLOCKED_IN<3>: length 30.9
  TOP w0.18: CN16.1 74.47,52.89 72.29,50.71 69.57,50.71 60.69,41.83 52.74,41.83 51.83,40.93 U1.1
DC_BLOCKED_IN<4>: length 29.2
  TOP w0.18: U1.2 51.33,40.93 52.59,42.19 60.54,42.19 69.56,51.21 70.79,51.21 71.85,52.27 CN15.7
DC_BLOCKED_IN<5>: length 28.8
  TOP w0.18: U1.3 50.83,40.94 52.44,42.55 60.39,42.55 69.55,51.71 70.29,51.71 71.05,52.47 CN15.5
DC_BLOCKED_IN<6>: length 28.2
  TOP w0.18: U1.4 50.33,40.95 52.29,42.91 60.24,42.91 70.25,52.92 CN15.3
DC_BLOCKED_IN<7>: length 28.1
  TOP w0.18: U1.5 49.83,39.78 49.83,40.96 52.14,43.27 60.09,43.27 69.45,52.63 CN15.1
DC_BLOCKED_IN<8>: length 27.2
  TOP w0.18: U1.6 49.33,40.97 52.03,43.67 59.86,43.67 59.89,43.7 59.9,43.7 66.83,50.63 CN14.7
DC_BLOCKED_IN<9>: length 27
  TOP w0.18: CN14.5 66.03,50.34 59.75,44.06 51.91,44.06 48.83,40.98 U1.7
DC_BLOCKED_IN<10>: length 26.9
  TOP w0.18: U1.8 48.33,40.99 51.76,44.42 59.55,44.42 65.23,50.1 CN14.3
DC_BLOCKED_IN<11>: length 26.7
  TOP w0.18: CN14.1 64.43,49.91 59.29,44.78 51.61,44.78 47.83,41 U1.9
DC_BLOCKED_IN<12>: length 25.7
  TOP w0.18: U1.10 47.33,39.78 47.34,39.79 47.34,41.02 51.48,45.15 59.04,45.15 61.8,47.91 CN13.7
DC_BLOCKED_IN<13>: length 25.6
  TOP w0.18: U1.11 46.83,39.78 46.82,39.79 46.82,41 51.36,45.55 58.88,45.55 61,47.67 CN13.5
DC_BLOCKED_IN<14>: length 25.5
  TOP w0.18: CN13.3 60.2,47.38 58.76,45.94 51.24,45.94 46.33,41.03 U1.12
DC_BLOCKED_IN<15>: length 25.3
  TOP w0.18: U1.13 45.83,41.04 51.12,46.33 58.59,46.33 59.4,47.14 CN13.1
DC_BLOCKED_IN<16>: length 22
  TOP w0.18: U1.14 45.33,41.04 51,46.72 54.15,46.72 56.89,49.45 CN12.7
DC_BLOCKED_IN<17>: length 21.9
  TOP w0.18: CN12.5 56.09,49.26 53.92,47.09 50.79,47.09 44.83,41.12 U1.15
DC_BLOCKED_IN<18>: length 21.6
  TOP w0.18: U1.16 44.33,41.13 50.66,47.46 53.64,47.46 55.29,49.11 CN12.3
DC_BLOCKED_IN<19>: length 21.5
  TOP w0.18: U1.17 43.83,41.14 50.57,47.88 53.46,47.88 54.49,48.91 CN12.1
DC_BLOCKED_IN<20>: length 18.9
  TOP w0.18: U1.18 43.33,41.15 51.79,49.61 CN11.7
DC_BLOCKED_IN<21>: length 18.7
  TOP w0.18: U1.19 42.83,41.16 50.99,49.32 CN11.5
DC_BLOCKED_IN<22>: length 18.6
  TOP w0.18: U1.20 42.33,41.17 50.19,49.03 CN11.3
DC_BLOCKED_IN<23>: length 18.5
  TOP w0.18: CN11.1 49.39,48.77 45.88,45.25 41.83,41.2 41.83,39.78 41.83,39.78 U1.21
DC_BLOCKED_IN<24>: length 17.6
  TOP w0.18: CN10.7 46.73,46.62 41.33,41.21 U1.22
DC_BLOCKED_IN<25>: length 17.4
  TOP w0.18: U1.23 40.83,41.22 45.93,46.33 CN10.5
DC_BLOCKED_IN<26>: length 17.3
  TOP w0.18: U1.24 40.33,41.23 45.13,46.04 CN10.3
DC_BLOCKED_IN<27>: length 17.2
  TOP w0.18: U1.25 39.83,41.24 44.33,45.75 CN10.1
DC_BLOCKED_IN<28>: length 16.3
  TOP w0.18: U1.26 39.33,42.16 41.71,44.55 CN9.7
DC_BLOCKED_IN<29>: length 16.2
  TOP w0.18: CN9.5 40.91,44.31 38.83,42.23 U1.27
DC_BLOCKED_IN<30>: length 16.1
  TOP w0.18: CN9.3 40.11,44.08 38.33,42.3 U1.28
DC_BLOCKED_IN<31>: length 15.9
  TOP w0.18: CN9.1 39.31,43.8 37.83,42.32 U1.29
DC_BLOCKED_IN<32>: length 15.4
  TOP w0.18: U1.31 36.83,42.21 36.69,42.35 36.69,52.79 36.69,52.79 CN8.7
DC_BLOCKED_IN<33>: length 15.5
  TOP w0.18: CN8.5 35.89,42.76 36.33,42.31 U1.32
DC_BLOCKED_IN<34>: length 15.6
  TOP w0.18: U1.33 35.83,42.21 35.09,42.95 35.09,52.79 35.09,52.79 CN8.3
DC_BLOCKED_IN<35>: length 15.8
  TOP w0.18: U1.34 35.33,42.11 34.29,43.16 CN8.1
DC_BLOCKED_IN<36>: length 16.6
  TOP w0.18: U1.35 34.83,41.45 31.67,44.61 CN7.7
DC_BLOCKED_IN<37>: length 16.8
  TOP w0.18: CN7.5 30.87,53.06 30.89,53.03 30.89,44.21 31.43,43.68 32.23,42.87 34.33,40.77 U1.36
DC_BLOCKED_IN<38>: length 16.9
  TOP w0.18: U1.37 33.83,40.51 32.18,42.16 31.03,43.32 30.93,43.41 30.82,43.53 30.07,44.28 CN7.3
DC_BLOCKED_IN<39>: length 17
  TOP w0.18: CN7.1 29.27,44.54 30.64,43.17 30.64,43.17 33.33,40.48 U1.38
DC_BLOCKED_IN<40>: length 17.9
  TOP w0.18: U1.39 32.83,40.42 30.52,42.73 30.39,42.87 30.15,43.1 26.64,46.61 CN6.7
DC_BLOCKED_IN<41>: length 18
  TOP w0.18: U1.40 32.33,40.41 30.26,42.48 25.84,46.9 CN6.5
DC_BLOCKED_IN<42>: length 18.1
  TOP w0.18: CN6.3 25.04,47.18 25.41,46.81 25.42,46.81 31.83,40.4 U1.41
DC_BLOCKED_IN<43>: length 18.3
  TOP w0.18: U1.42 31.33,40.39 29.65,42.08 29.62,42.1 29.52,42.21 25.28,46.45 25.27,46.45 24.24,47.47 CN6.1
DC_BLOCKED_IN<44>: length 20
  TOP w0.18: U1.43 30.83,40.38 25.13,46.09 25.12,46.09 23.85,47.35 22.45,47.35 21.62,48.18 CN5.7
DC_BLOCKED_IN<45>: length 20.3
  TOP w0.18: U1.44 30.33,40.38 24.98,45.73 24.97,45.73 23.7,46.99 21.91,46.99 20.82,48.08 CN5.5
DC_BLOCKED_IN<46>: length 20.5
  TOP w0.18: CN5.3 20.02,48.25 21.64,46.63 23.55,46.63 24.82,45.37 24.83,45.37 29.83,40.37 U1.45
DC_BLOCKED_IN<47>: length 20.8
  TOP w0.18: CN5.1 19.22,48.18 21.13,46.27 23.4,46.27 24.67,45.01 24.68,45.01 29.33,40.36 U1.46
DC_BLOCKED_IN<48>: length 24.1
  TOP w0.18: U1.47 28.83,40.35 24.53,44.65 24.52,44.65 23.26,45.91 16.89,45.91 16.59,46.21 16.59,53.05 16.6,53.06 CN4.7
DC_BLOCKED_IN<49>: length 24.4
  TOP w0.18: U1.48 28.33,40.34 24.38,44.29 24.37,44.29 23.11,45.55 16.55,45.55 15.8,46.31 CN4.5
DC_BLOCKED_IN<50>: length 24.6
  TOP w0.18: U1.49 27.83,40.32 25.27,42.87 25.27,42.88 22.96,45.19 16.21,45.19 15,46.41 CN4.3
DC_BLOCKED_IN<51>: length 24.8
  TOP w0.18: CN4.1 14.2,46.61 15.97,44.83 22.81,44.83 24.91,42.73 24.91,42.73 27.33,40.31 U1.50
DC_BLOCKED_IN<52>: length 25.8
  TOP w0.18: CN3.7 11.58,53.06 11.59,53.04 11.59,48.41 15.53,44.47 22.66,44.47 24.55,42.58 24.55,42.58 26.83,40.3 U1.51
DC_BLOCKED_IN<53>: length 26
  TOP w0.18: CN3.5 10.78,53.06 10.79,53.04 10.79,48.62 15.3,44.11 22.51,44.11 24.19,42.43 24.19,42.43 26.33,40.29 U1.52
DC_BLOCKED_IN<54>: length 26.1
  TOP w0.18: CN3.3 9.98,48.93 15.15,43.75 22.36,43.75 23.83,42.28 23.83,42.28 25.83,40.28 U1.53
DC_BLOCKED_IN<55>: length 26.2
  TOP w0.18: CN3.1 9.18,49.21 14.99,43.39 22.21,43.39 23.47,42.13 23.47,42.13 25.33,40.27 U1.54
DC_BLOCKED_IN<56>: length 27.1
  TOP w0.18: CN2.7 6.55,51.31 14.83,43.03 21.98,43.03 24.83,40.19 U1.55
DC_BLOCKED_IN<57>: length 27.1
  TOP w0.18: CN2.5 5.75,51.6 14.68,42.67 21.71,42.67 24.33,40.06 U1.56
DC_BLOCKED_IN<58>: length 27.3
  TOP w0.18: U1.57 23.83,40.05 21.56,42.31 14.53,42.31 14.29,42.55 4.95,51.89 CN2.3
DC_BLOCKED_IN<59>: length 27.4
  TOP w0.18: CN2.1 4.15,53.06 4.15,53.06 4.15,52.18 13.51,42.82 14.38,41.95 21.41,41.95 23.33,40.04 U1.58
DC_BLOCKED_IN<60>: length 29.2
  TOP w0.18: CN1.7 1.53,52.71 3.43,50.81 5.01,50.81 13.15,42.68 13.57,42.25 13.99,41.83 14.23,41.59 21.27,41.59 22.83,40.03 U1.59
DC_BLOCKED_IN<61>: length 29.6
  TOP w0.18: U1.60 22.33,40.02 21.12,41.23 14,41.23 5.02,50.21 2.99,50.21 0.73,52.47 CN1.5
DC_BLOCKED_IN<62>: length 30.3
  TOP w0.18: CN1.3 -0.07,52.54 2.76,49.71 4.94,49.71 13.78,40.87 19.11,40.87 20.09,39.9 U1.61
DC_BLOCKED_IN<63>: length 30.8
  TOP w0.18: CN1.1 -0.87,52.54 2.66,49.01 5.13,49.01 13.21,40.93 13.63,40.51 16.45,40.51 17.46,39.51 17.46,36.68 18.53,35.61 U1.62
EN_OTAG: length 15.3
  TOP w0.18: U1.213 55.38,22.61 57.4,24.64 60.2,24.64 61.47,23.37 66.41,23.37 66.92,22.86 LK58.1
G_DIODE: length 17.7
  TOP w0.18: U1.91 v1(22.15,21.11)
  L3 w0.18: v1(22.15,21.11) 20.52,21.11 20.32,20.91 16.42,20.91 15.54,21.8 12.45,21.8 11.98,21.34 LK25.1
  BOTTOM w0.18: C27.2 22.18,21.07 v1(22.15,21.11)
HOLD1: length 18.7
  TOP w0.18: U1.79 17.34,27.11 16.76,27.69 12.45,27.69 9.65,30.48 LK62.1
HOLD2: length 18.3
  TOP w0.18: LK65.1 9.4,28.45 10.52,27.32 15.14,27.32 15.79,26.67 18.11,26.67 18.29,26.49 18.29,26.49 18.66,26.11 U1.81
